# Altium PCB flatsat_2_PCB.PcbDoc (part 1 of 6)
Units mil, origin at the board's own origin, x right, y up, seen from the top; angles counter-clockwise.
Board outline 15748.03 x 9842.52 mil, 4 copper layers (Top Layer, FlatSat GND, FlatSat VCC, Bottom Layer), stack 82.765 mil thick; 155 components, 191 nets, 1391 pads, 1634 vias.
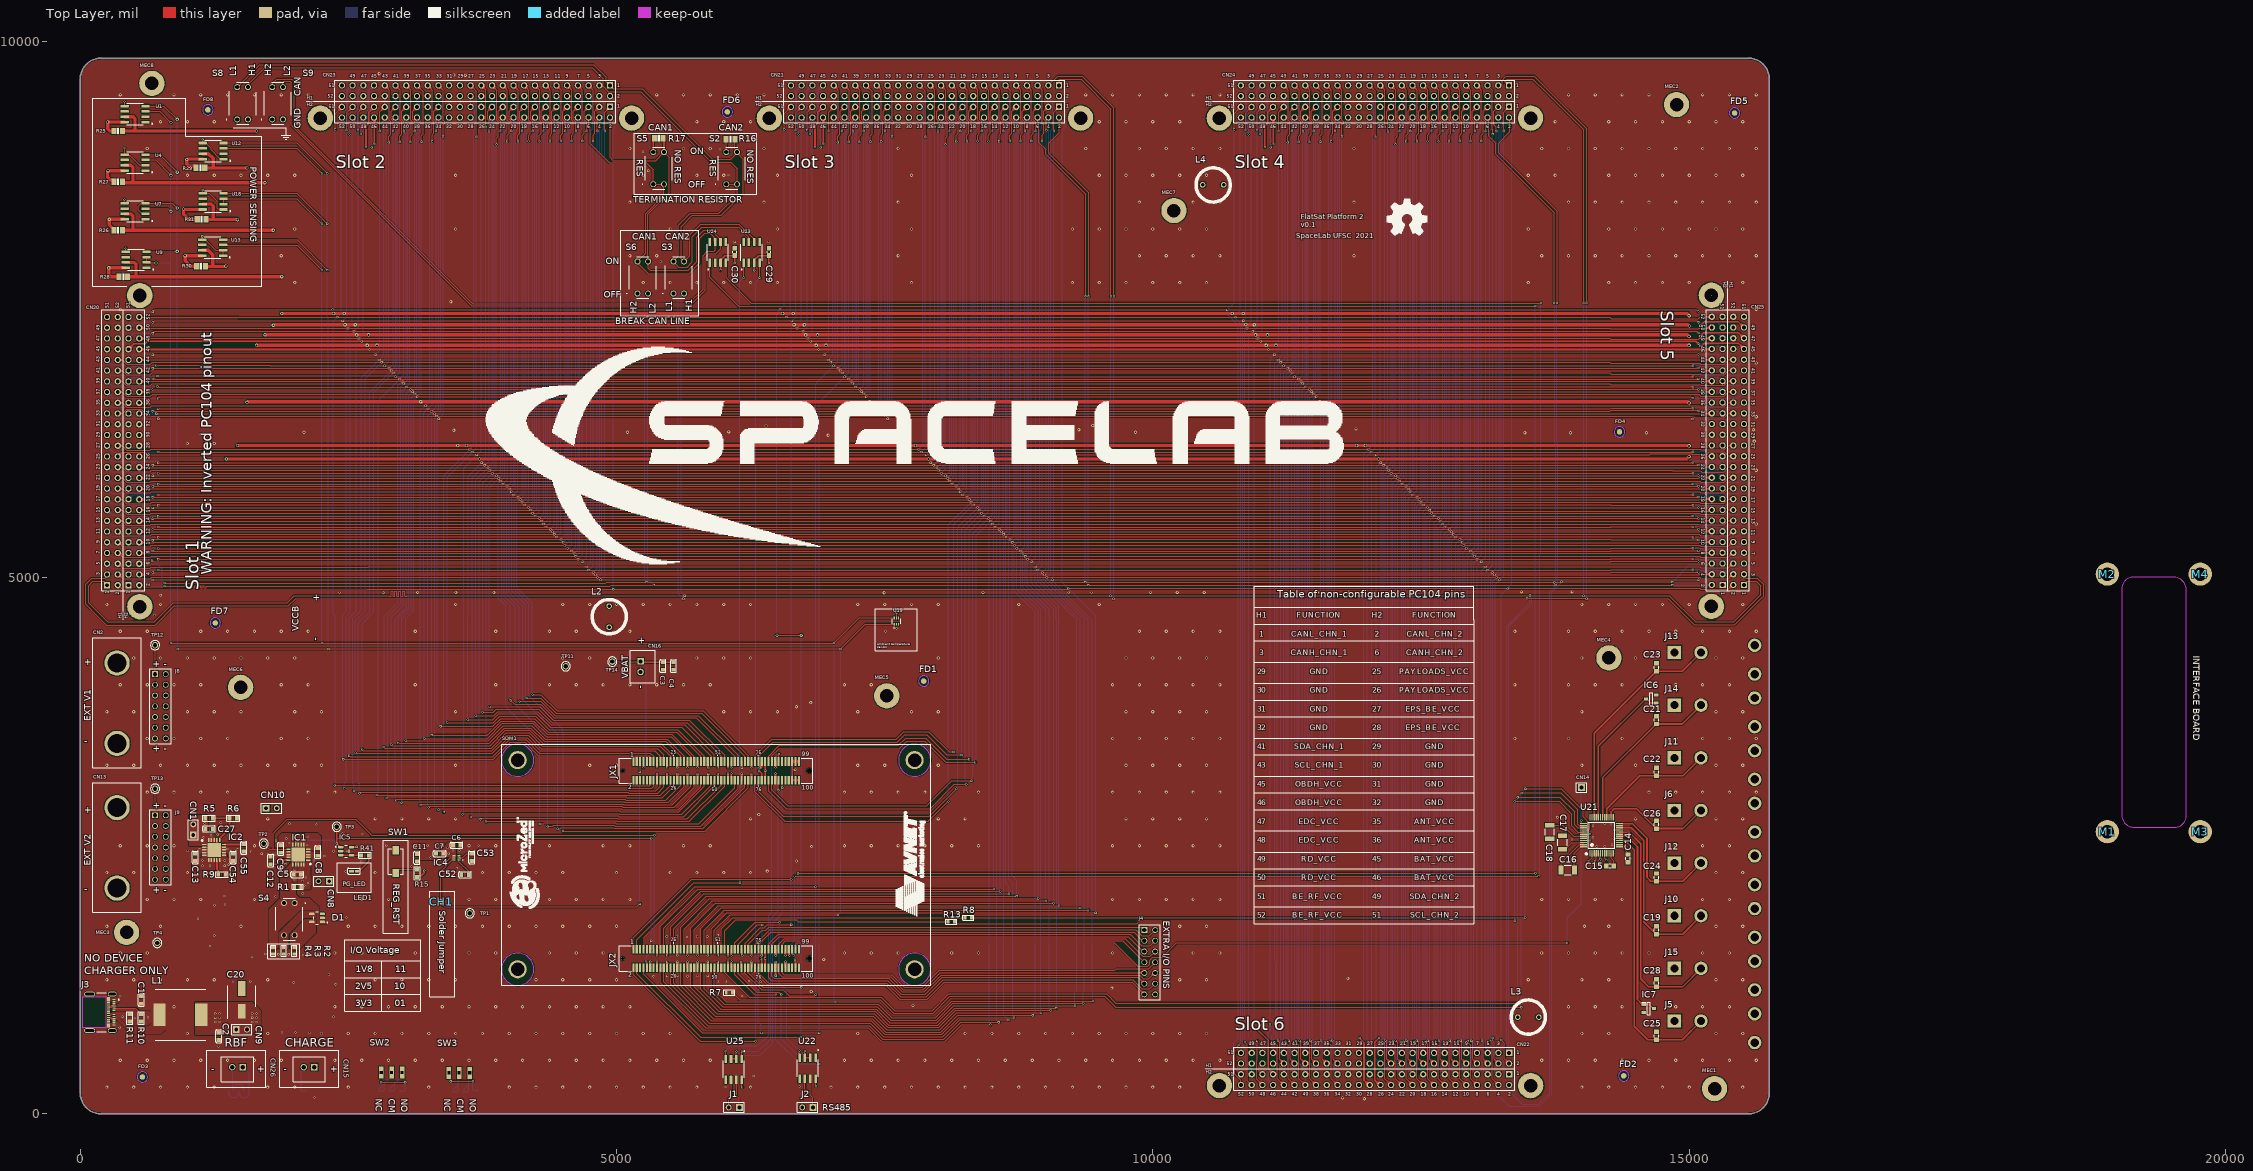
[diagram p0: Top Layer view]
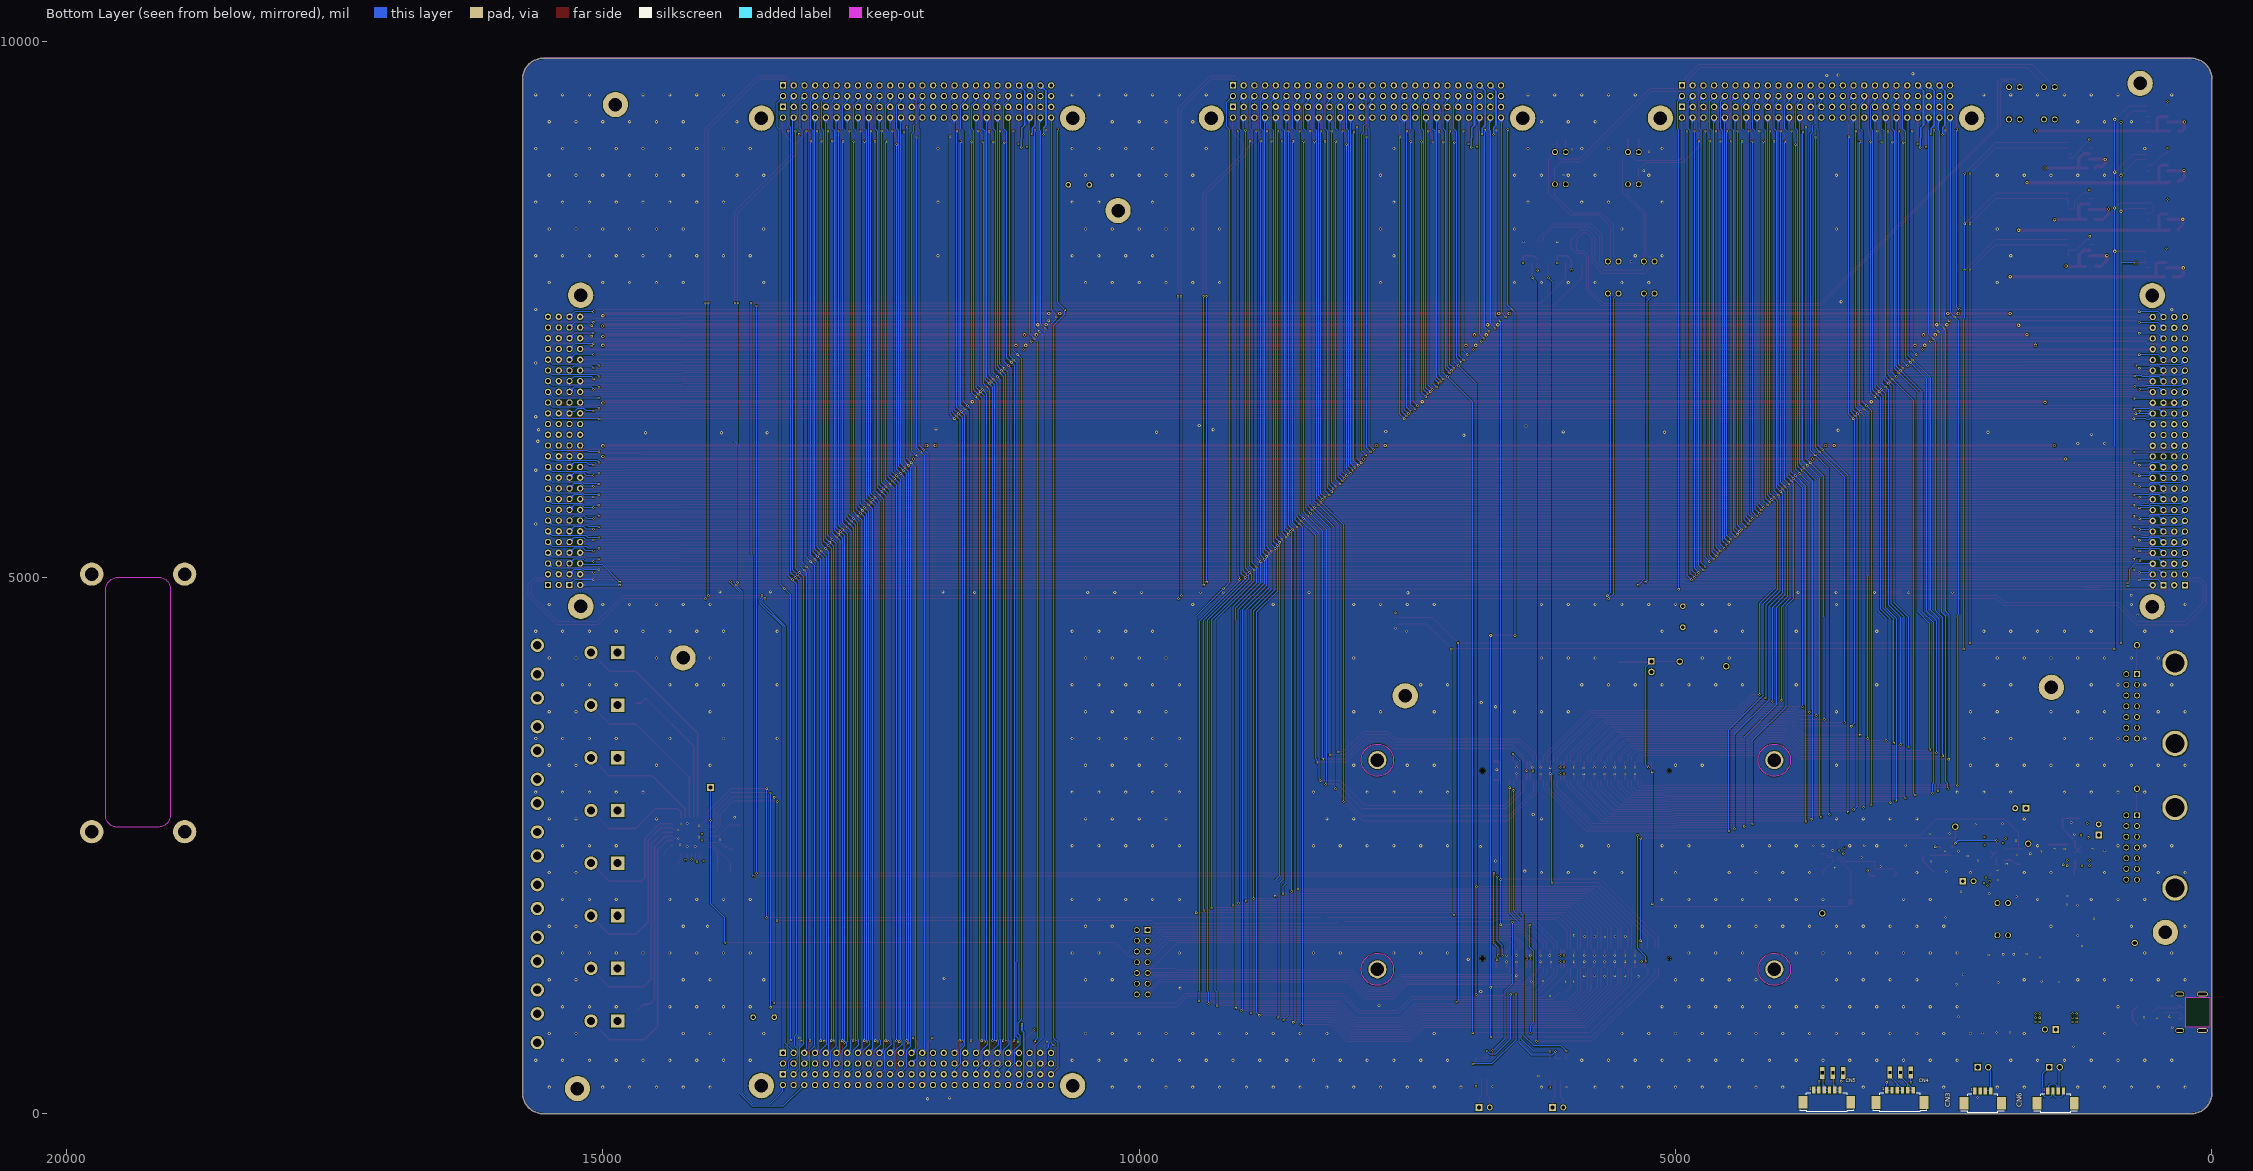
[diagram p1: Bottom Layer view, seen from below]
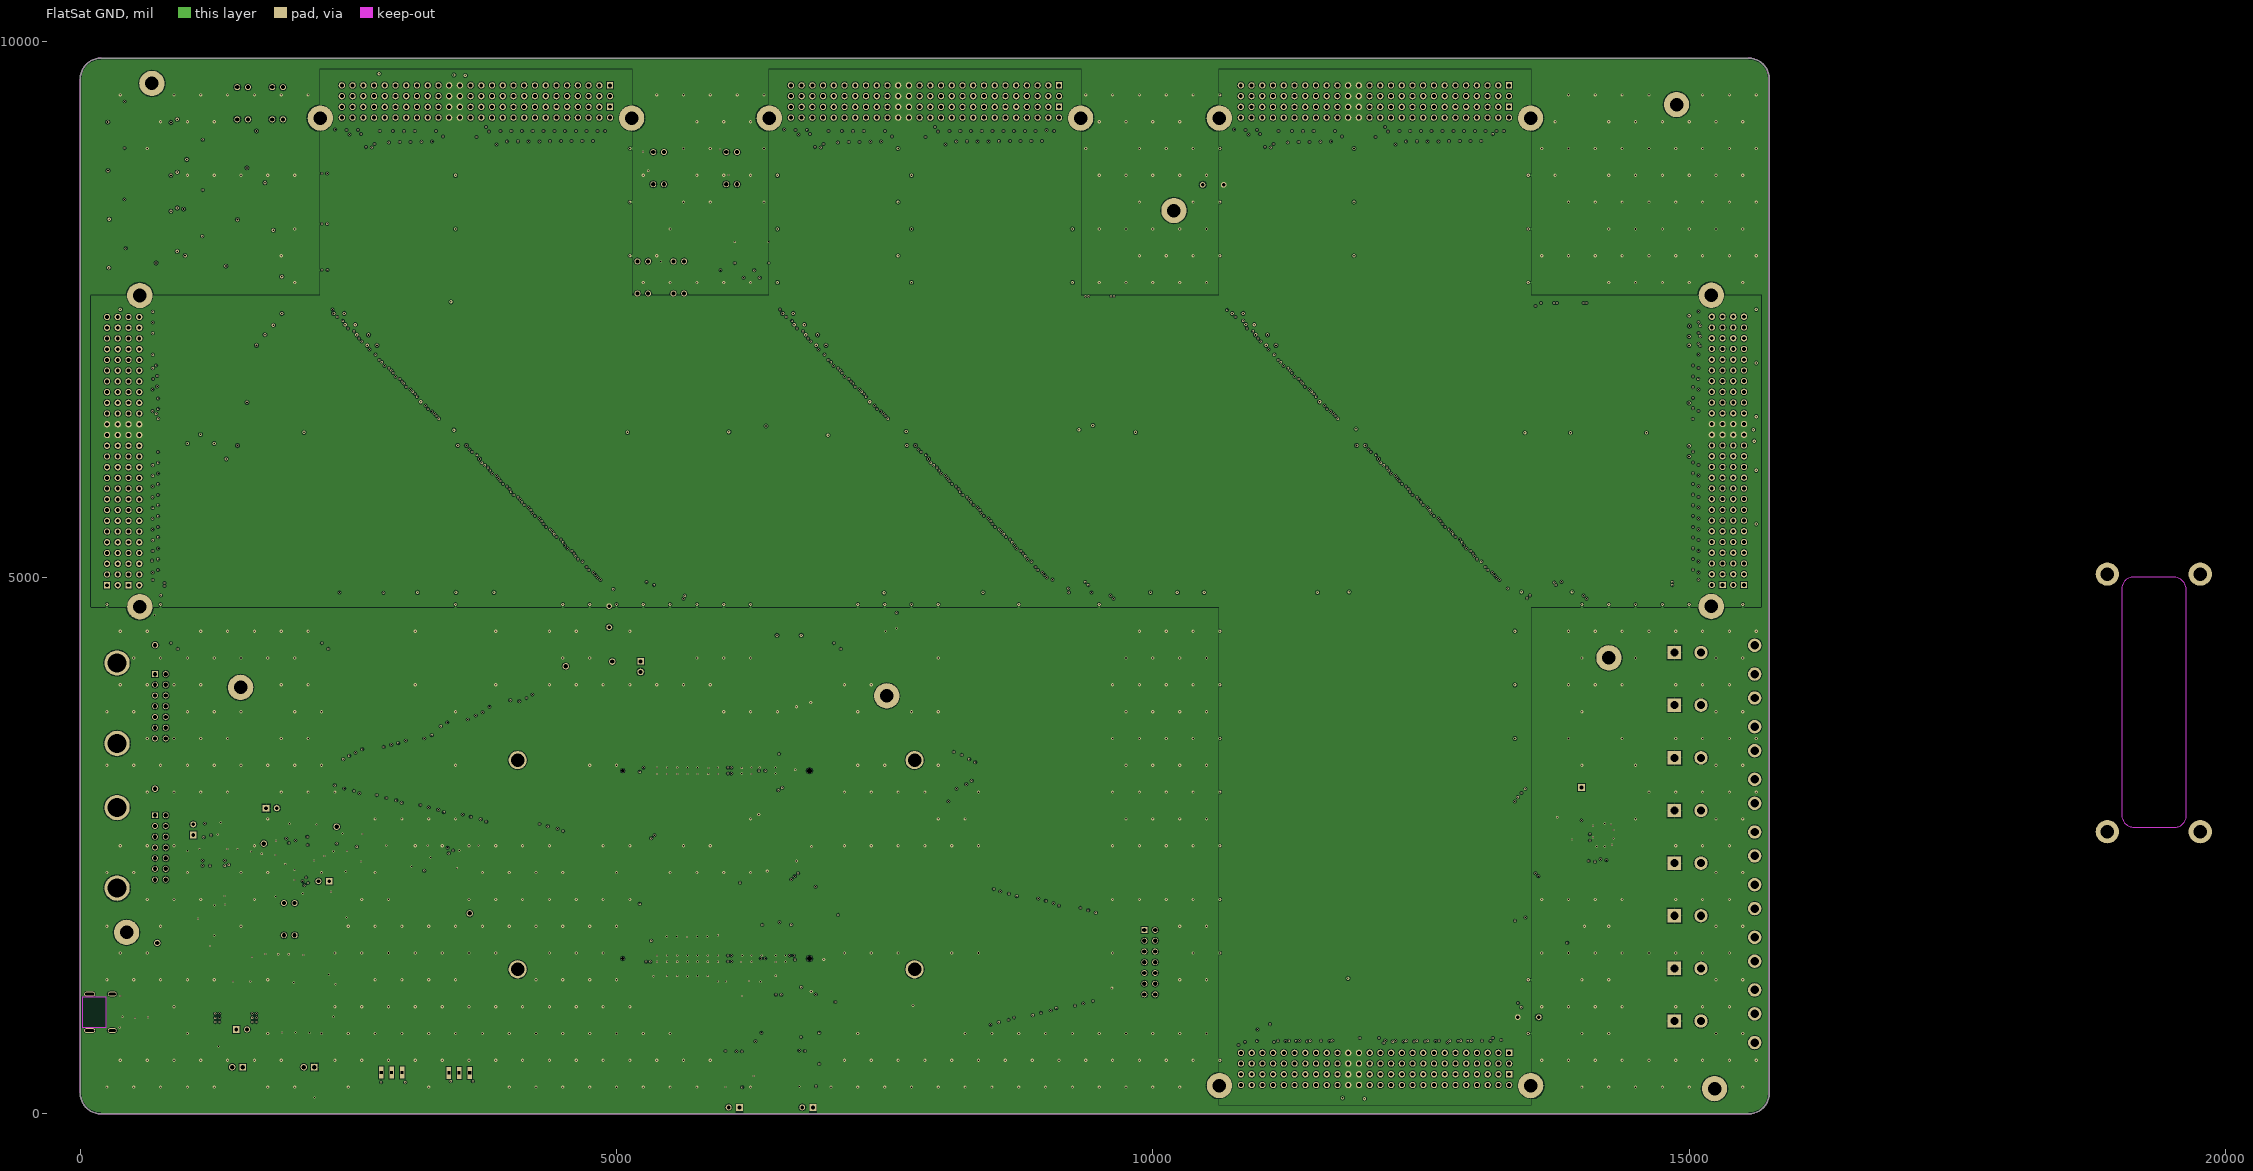
[diagram p2: FlatSat GND]
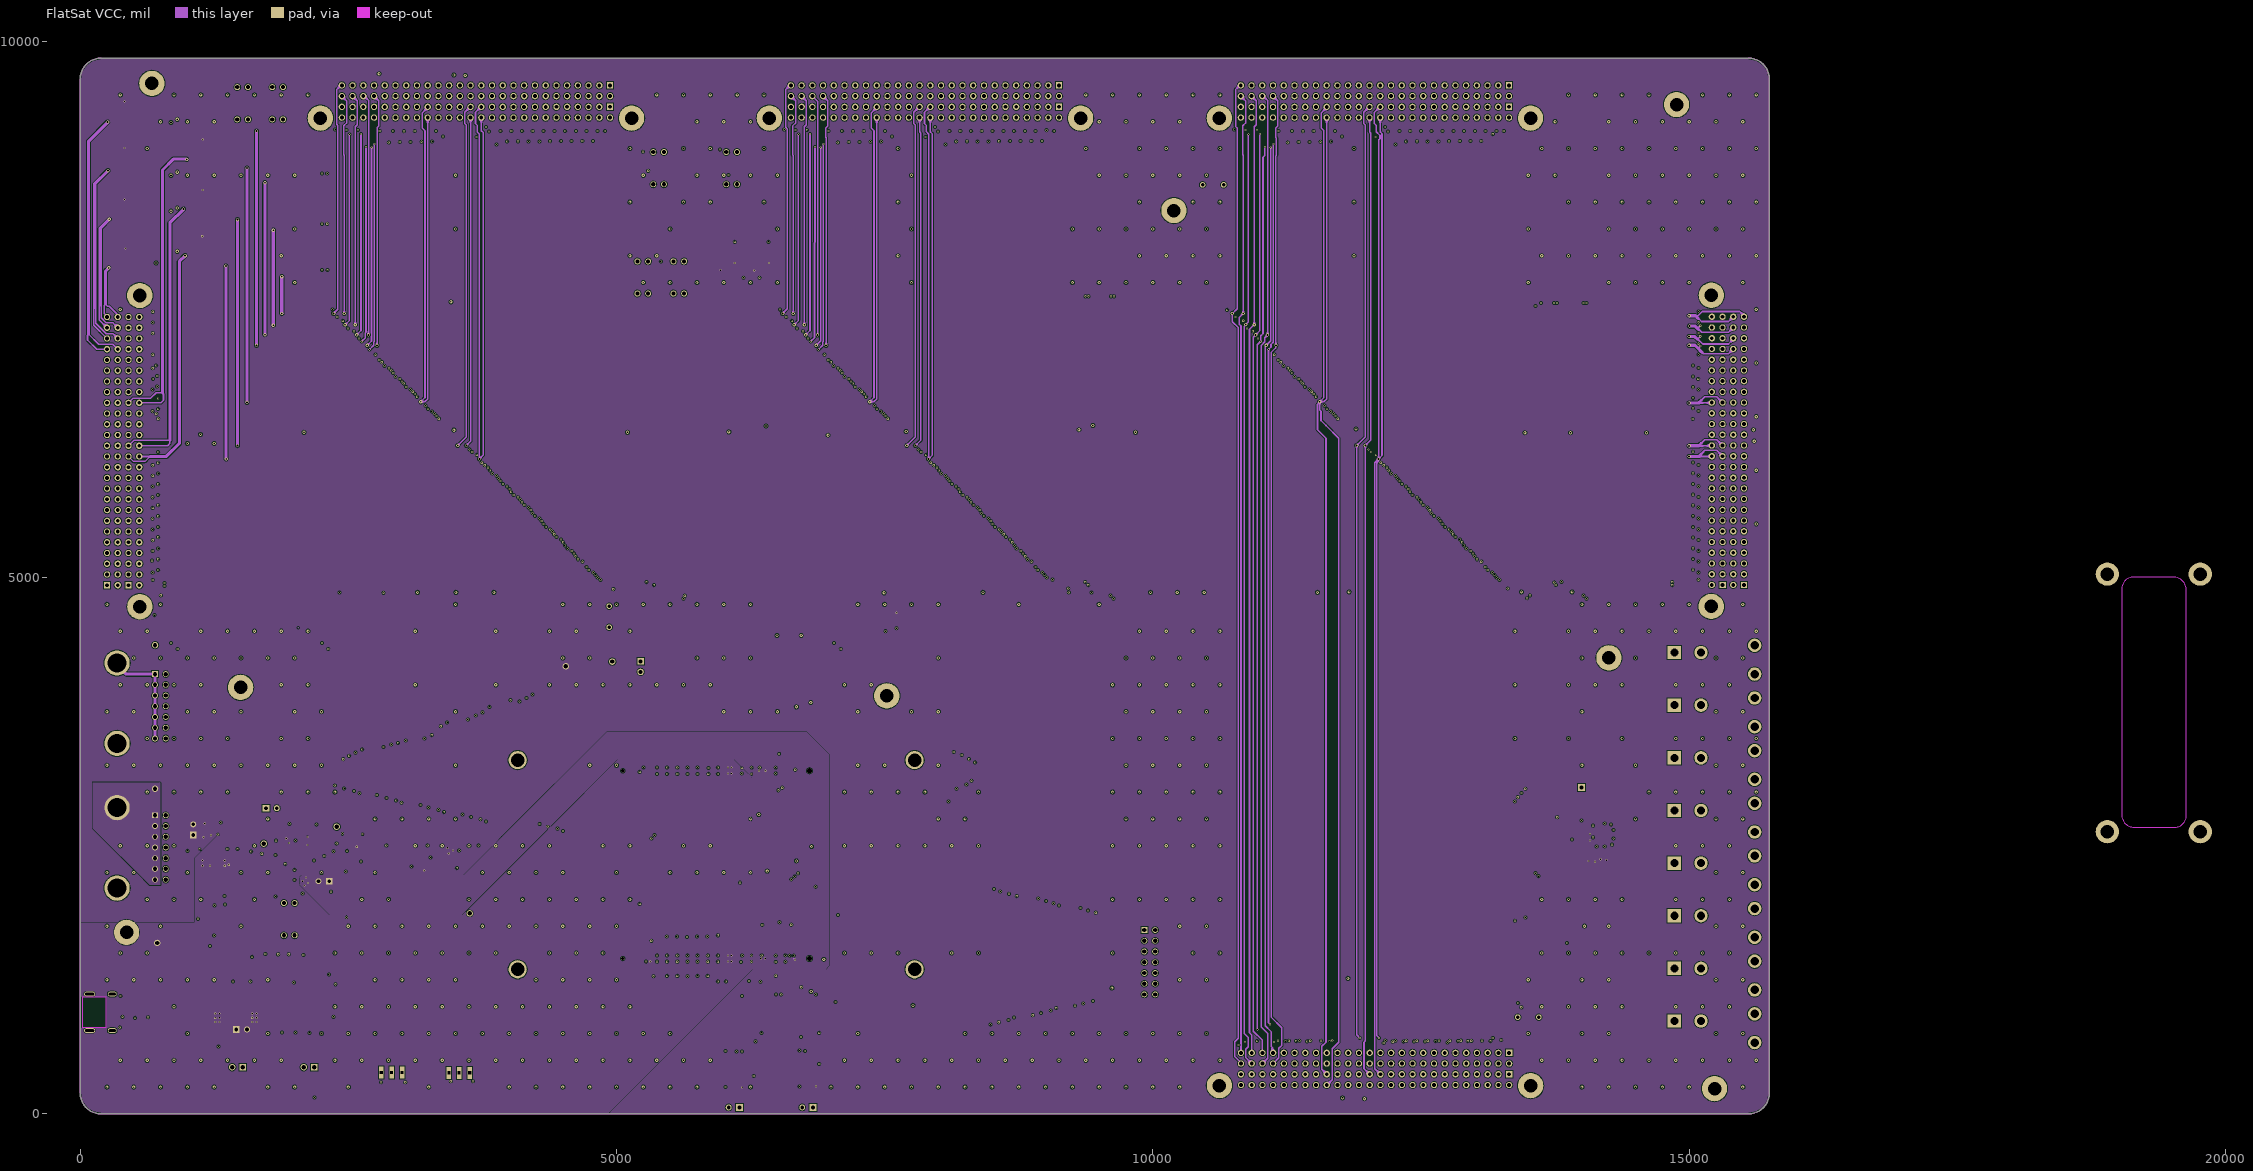
[diagram p3: FlatSat VCC]

## Layer stack, top to bottom
Top Solder: solder mask 0.5118, Solder Resist, Dk 3.3
Top Layer: signal copper 1.4
Dielectric 2: prepreg 7.0866, FR-4, Dk 4.29
FlatSat GND: signal copper 1.4
Dielectric 1: dielectric 62.9921, FR-4, Dk 4.29
FlatSat VCC: signal copper 1.4
Dielectric 3: prepreg 7.0866, FR-4, Dk 4.29
Bottom Layer: signal copper 1.4
Bottom Solder: solder mask 0.5118, Solder Resist, Dk 3.3

## Board outline
196.85,0 cw(c196.85,196.85) 0,196.85 0,9645.67 cw(c196.85,9645.67) 196.85,9842.52 15551.18,9842.52 cw(c15551.18,9645.67) 15748.03,9645.67 15748.03,196.85 cw(c15551.18,196.85) 15551.18,0
cut-out: 19031.5,4893.7 19031.5,2789.37 ccw(c19147.64,2789.37) 19147.64,2673.23 19527.56,2673.23 ccw(c19527.56,2779.53) 19633.86,2779.53 19633.86,4883.86 ccw(c19513.78,4883.86) 19513.78,5003.94 19141.73,5003.94 ccw(c19141.73,4893.7)

## Design rules (kind name [scope] priority, off if disabled: settings)
Clearance "Stitching GND" [IsStitchingVia and InNet('GND') vs (IsVia and (Not IsStitchingVia)) Or IsPad] p1: gap=10 ignorepadtopadclearanceinfootprint=FALSE except(16: THPad-Via THPad-Hole Via-Via Via-Hole)
Clearance [All] p2: gap=7.01 ignorepadtopadclearanceinfootprint=FALSE
DiffPairsRouting DiffPair_DIFF90DiffPairsRouting [InDifferentialPairClass('DIFF90')] p1: maxlimit=10 minlimit=8 mostfreqgap=9.17 toplayer_minwidth=8 toplayer_maxwidth=8 toplayer_prefwidth=8 midlayer1_minwidth=8 midlayer1_maxwidth=8 midlayer1_prefwidth=8 midlayer2_minwidth=8 midlayer2_maxwidth=8 midlayer2_prefwidth=8 bottomlayer_minwidth=8 bottomlayer_maxwidth=8 bottomlayer_prefwidth=8 maxuncoupledlength=500
DiffPairsRouting DiffPair_DIFF120DiffPairsRouting [InDifferentialPairClass('DIFF120')] p2: maxlimit=196.85 minlimit=15 mostfreqgap=20 toplayer_minwidth=8 toplayer_maxwidth=8 toplayer_prefwidth=8 midlayer1_minwidth=8 midlayer1_maxwidth=8 midlayer1_prefwidth=8 midlayer2_minwidth=8 midlayer2_maxwidth=8 midlayer2_prefwidth=8 bottomlayer_minwidth=8 bottomlayer_maxwidth=8 bottomlayer_prefwidth=8 maxuncoupledlength=393.7
DiffPairsRouting [All] p3: maxlimit=10 minlimit=10 mostfreqgap=10 toplayer_minwidth=15 toplayer_maxwidth=15 toplayer_prefwidth=15 midlayer1_minwidth=15 midlayer1_maxwidth=15 midlayer1_prefwidth=15 midlayer2_minwidth=15 midlayer2_maxwidth=15 midlayer2_prefwidth=15 bottomlayer_minwidth=15 bottomlayer_maxwidth=15 bottomlayer_prefwidth=15 maxuncoupledlength=500
HoleSize [All] p1: absolutevalues=TRUE maxlimit=200 minlimit=1 maxpercent=80.000 minpercent=20.000
MatchedLengths DiffPair_DIFF90MatchedLengths [InDifferentialPairClass('DIFF90')] p1: tolerance=157.48 checknetsindiffpair=TRUE checkdiffpairvsdiffpair=FALSE checkxsignals=FALSE checkothers=FALSE
MatchedLengths DiffPair_DIFF120MatchedLengths [InDifferentialPairClass('DIFF120')] p2: tolerance=157.48 checknetsindiffpair=TRUE checkdiffpairvsdiffpair=FALSE checkxsignals=FALSE checkothers=FALSE
MatchedLengths DiffPair_DIFF_120_2MatchedLengths [InDifferentialPairClass('DIFF_120_2')] p3: tolerance=1000 checknetsindiffpair=FALSE checkdiffpairvsdiffpair=TRUE checkxsignals=TRUE checkothers=TRUE
MatchedLengths DiffPair_DIFF_120_1MatchedLengths [InDifferentialPairClass('DIFF_120_1')] p4: tolerance=1000 checknetsindiffpair=FALSE checkdiffpairvsdiffpair=TRUE checkxsignals=TRUE checkothers=TRUE
MinimumSolderMaskSliver [All] p1: minsoldermaskwidth=0
PlaneClearance GND_PlaneClearance [InNet('GND')] p1: clearance=9.84
PlaneClearance PlaneClearance_1 [All] p2: clearance=7.87
PlaneConnect PWR [(InNet('+5V') OR InNet('VCCB') OR InNet('VBAT') OR InNet('USB_VBUS') OR InNet('VCCIO'))] p1: planeconnectstyle=Direct reliefexpansion=20 reliefentries=4 reliefconductorwidth=10 reliefairgap=10
PlaneConnect GND_PlaneConnect [InNet('GND')] p2: pad.planeconnectstyle=Relief pad.reliefexpansion=0 pad.reliefentries=4 pad.reliefconductorwidth=6.89 pad.reliefairgap=6.89 via.planeconnectstyle=Direct via.reliefexpansion=20 via.reliefentries=4 via.reliefconductorwidth=10 via.reliefairgap=10
PlaneConnect PlaneConnect_1 [All] p3: planeconnectstyle=Direct reliefexpansion=20 reliefentries=4 reliefconductorwidth=10 reliefairgap=10
PolygonConnect GND_PolygonConnect [InNet('GND')] p1: thpad.connectstyle=Relief thpad.reliefconductorwidth=10 thpad.reliefentries=4 thpad.polygonreliefangle="90 Angle" thpad.airgapwidth=10 smdpad.connectstyle=Relief smdpad.reliefconductorwidth=6.89 smdpad.reliefentries=4 smdpad.polygonreliefangle="90 Angle" smdpad.airgapwidth=6.89 smdpad.conductorbypadedge=TRUE smdpad.mindistance=15 smdpad.enablemindistance=FALSE via.connectstyle=Direct via.reliefconductorwidth=10 via.reliefentries=4 via.polygonreliefangle="90 Angle" via.airgapwidth=10
PolygonConnect PolygonConnect_1 [All] p2: connectstyle=Direct reliefconductorwidth=10 reliefentries=4 polygonreliefangle="90 Angle" airgapwidth=10
RoutingVias [All] p1: holewidth=28 width=50 viastyle="Through Hole" minholewidth=28 minwidth=50 maxholewidth=28 maxwidth=50
SilkToSilkClearance [All] p1: silktosilkclearance=5
SilkToSolderMaskClearance [IsPad] p1: minsilkscreentomaskgap=0 clearancetoexposedcopper=TRUE
SolderMaskExpansion SolderMaskExpansion_Via [IsVia] p1: expansion=4 istentingtop=FALSE
SolderMaskExpansion SolderMaskExpansion_1 [All] p2: expansion=4 istentingtop=FALSE
SupplyNets "Schematic Supply Nets" [InNet('GND')] p1: voltage=0.000
SupplyNets "Schematic Supply Nets_4" [InNet('VCCIO')] p2: voltage=0.000
SupplyNets "Schematic Supply Nets_10" [InNet('+5V')] p3: voltage=0.000
Width [All] p1: maxlimit=30 minlimit=7.95 preferedwidth=15 midlayer2_maxwidth=15 midlayer2_prefwidth=10.98 bottomlayer_maxwidth=15 bottomlayer_prefwidth=11 minimp=50.000000 maximp=50.000000 favimp=50.000000
23 further rules are at their usual default settings.

## Classes and differential pairs
component class power_schematic: C1 C2 C3 C4 C5 C6 C7 C8 C9 C11 C12 C13 C20 C27 C52 C53 C54 C55 CH1 CN1 CN2 CN3 CN8 CN9 CN10 CN13 CN15 CN16 D1 IC1 IC2 IC4 IC5 J3 J8 J9 L1 LED1 R1 R2 R3 R4 R5 R6 R9 R10 R11 R15 R41 S4 SW1
component class kill-switches_schematic: CN4 CN5 CN6 CN26 SW2 SW3
differential pair RS485_02: +RS485_02_P -RS485_02_N
differential pair RS485_01: +RS485_01_P -RS485_01_N
differential pair H2: +H2_P -H2_N
differential pair H1: +H1_P -H1_N
differential pair CAN_CHN_2: +CAN_CHN_2_P -CAN_CHN_2_N
differential pair CAN_CHN_1: +CAN_CHN_1_P -CAN_CHN_1_N

## Components (designator, comment, footprint, x,y, rotation, side; value= is the part's Value field where it differs from the comment)
C1 "GRM188R71C103KA01D" C0603_MD 570.87,1062.99 r90 top value=10n
C2 "CL10B104KA8NNNC" C0603_MD 1291.34,724.41 r270 top value=100n
C3 "GRM188R71H104JA93D" C0603_MD 5433.07,4175.2 r270 top value=0.1uF
C4 "EMK107BB7225MA-T" C0603_MD 5531.5,4175.2 r270 top value=2.2uF
C5 "Cout" C0603_MD 2024.61,2231.3 r180 top value=10uF
C6 "EMK107F105ZA-T" C0603_MD 3509.84,2505.47 r0 top value=1uF
C7 "CL10B104KA8NNNC" C0603_MD 3352.36,2426.73 r180 top value=0.1uF
C8 "Cin" C0603_MD 2214.57,2440.94 r270 top value=1uF
C9 "Cbias" C0603_MD 1870.08,2470.47 r270 top value=1uF
C11 "CL10B104KA8NNNC" C0603_MD 3139.76,2387.36 r270 top value=0.1uF
C12 "CL10B103KB8NNNC" C0603_MD 1775.59,2362.2 r90 top value=10nF
C13 "Cin" C0603_MD 1072.83,2391.73 r90 top value=1uF
C14 "1.0uF/50V" CC0805 14429.13,2381.89 r270 top
C15 "1.0uF/50V" CC0805 14261.81,2312.99 r180 top
C16 "10uF/16V" CC1210 13868.11,2273.62 r180 top
C17 "10uF/16V" CC1210 13818.9,2529.53 r90 top
C18 "10uF/16V" CC1210 13700.79,2627.95 r270 top
C19 "0.1uF/25V" CC0805 14694.88,1712.6 r270 top
C20 "865080845004" CAPAE660X770N 1505.91,1062.99 r90 top value=4.7uF
C21 "0.1uF/25V" CC0805 14694.88,3671.26 r270 top
C22 "0.1uF/25V" CC0805 14694.88,3188.98 r270 top
C23 "0.1uF/25V" CC0805 14694.88,4163.39 r270 top
C24 "0.1uF/25V" CC0805 14694.88,2204.72 r270 top
C25 "0.1uF/25V" CC0805 14694.88,728.35 r270 top
C26 "0.1uF/25V" CC0805 14694.88,2696.85 r270 top
C27 "Cout" C0603_MD 1200.79,2657.48 r0 top value=10uF
C28 "0.1uF/25V" CC0805 14694.88,1220.47 r270 top
C29 "100nF/50V" CC0603 6421.26,8035.43 r90 top
C30 "100nF/50V" CC0603 6102.36,8035.43 r90 top
C52 "CL10B473KB8NNNC" C0603_MD 3588.58,2229.88 r180 top value=0.047uF
C53 "CL10B223KB8NNNC" C0603_MD 3651.57,2391.73 r270 top value=0.022uF
C54 "Cbias" C0603_MD 1427.17,2391.73 r90 top value=1uF
C55 "CL10B103KB8NNNC" C0603_MD 1525.59,2480.32 r90 top value=10nF
CH1 "Solder Jumper" "Solder Jumper" 3366.14,1978.35 r270 top
CN1 "5-146285-2" "PIN BAR 2 2.54mm 180 GRAUS" 1055.12,2649.61 r90 top
CN2 "4243-0" 4243-0 344.49,3828.74 r90 top
CN3 "4 pin Picoblade" "PICO BLADE 0532610471" 2135.83,157.48 r180 bottom value=0533980471
CN4 "6 pin Picoblade" "PICO BLADE 0532610671" 2908.46,164.37 r180 bottom
CN5 "6 pin Picoblade" "PICO BLADE 0532610671" 3589.57,165.35 r180 bottom
CN6 "4 pin Picoblade" "PICO BLADE 0532610471" 1456.69,157.48 r180 bottom value=0533980471
CN8 "5-146285-2" "PIN BAR 2 2.54mm 180 GRAUS" 2271.65,2169.29 r180 top
CN9 "5-146285-2" "PIN BAR 2 2.54mm 180 GRAUS" 1505.91,787.4 r0 top
CN10 "5-146285-2" "PIN BAR 2 2.54mm 180 GRAUS" 1783.46,2850.39 r0 top
CN13 "4243-0" 4243-0 344.49,2480.31 r90 top
CN14 "TSW-101-05-T-S" "PIN BAR 1 2.54mm 180 GRAUS - Hide" 13996.06,3043.31 r270 top
CN15 "JST 2 position header 2.5mm" B2B-XH-A-M(LF)(SN) 2134.35,436.22 r180 top value=5-146285-2
CN16 "JST 2 position header 2.5mm" B2B-XH-A-M(LF)(SN) 5224.53,4169.57 r270 top
CN20 "PC104_inverted" PC104_INVERTED 556.18,4935.12 r90 top
CN21 "PC104" PC104 6610,9748.19 r0 top
CN22 "PC104" PC104 10805.6,729.42 r0 top
CN23 "PC104" PC104 2424.17,9748.19 r0 top
CN24 "PC104" PC104 10804.49,9748.19 r0 top
CN25 "PC104" PC104 15671.23,7447.28 r270 top
CN26 "JST 2 position header 2.5mm" B2B-XH-A-M(LF)(SN) 1466.54,436.22 r180 top
D1 "ESDS314DBVR" SOT95P280X145-5N 2208.66,1826.77 r180 top
FD1 "Fiducial 1.3" "Fiducial 1.3mm" 7864.17,4035.43 r0 top
FD2 "Fiducial 1.3" "Fiducial 1.3mm" 14389.76,354.33 r0 top
FD3 "Fiducial 1.3" "FIDUCIAL 1.3MM" 580.71,344.49 r0 top
FD4 "Fiducial 1.3" "FIDUCIAL 1.3MM" 14350.39,6358.27 r0 top
FD5 "Fiducial 1.3" "Fiducial 1.3mm" 15423.23,9330.71 r0 top
FD6 "Fiducial 1.3" "Fiducial 1.3mm" 6033.46,9340.55 r0 top
FD7 "Fiducial 1.3" "Fiducial 1.3mm" 1259.84,4576.77 r0 top
FD8 "Fiducial 1.3" "FIDUCIAL 1.3MM" 1190.94,9360.24 r0 top
IC1 "TPS74401RGWRM3" QFN65P500X500X100-21N-D 2034.45,2418.31 r180 top
IC2 "TPS74401RGWRM3" QFN65P500X500X100-21N-D 1250,2460.63 r0 top
IC4 "TPS3899DL30DSER" TPS3899DL30DSER 3509.84,2387.36 r180 top
IC5 "LM321LVIDBVR" SOT95P280X145-5N 2479.13,2449.8 r0 top
IC6 "MMBT3904" SOT95P240X120-3N 14645.67,3868.11 r180 top
IC7 "MMBT3904" SOT95P240X120-3N 14624.02,982.28 r0 top
J1 "5-146280-2" "PIN BAR 2 2.54mm 180 GRAUS" 6095.82,61.02 r180 top
J2 "5-146280-2" "PIN BAR 2 2.54MM 180 GRAUS" 6781.5,61.02 r180 top
J3 "1054500101" FP-1054500101-MFG 167.32,947.64 r270 top
J4 "87832-1420" SAMTEC_TSW-107-05-F-D 9921.26,1714.17 r270 top
J5 "Soquete de termopar" PCC-SMP-V-K 14862.2,866.18 r0 top
J6 "Soquete de termopar" PCC-SMP-V-K 14862.2,2829.06 r0 top
J8 "87832-1420" SAMTEC_TSW-107-05-F-D 698.2,4100.21 r270 top
J9 "87832-1420" SAMTEC_TSW-107-05-F-D 698.2,2784.25 r270 top
J10 "Soquete de termopar" PCC-SMP-V-K 14862.2,1847.62 r0 top
J11 "Soquete de termopar" PCC-SMP-V-K 14862.2,3319.77 r0 top
J12 "Soquete de termopar" PCC-SMP-V-K 14862.2,2338.34 r0 top
J13 "Soquete de termopar" PCC-SMP-V-K 14862.2,4301.21 r0 top
J14 "Soquete de termopar" PCC-SMP-V-K 14862.2,3810.49 r0 top
J15 "Soquete de termopar" PCC-SMP-V-K 14862.2,1356.9 r0 top
L1 "742792901" WE-PF_7427929...60 935.04,925.2 r0 top
L2 "RL622-3R3K-RC" RL622 4931.1,4635.83 r90 top
L3 "RL622-3R3K-RC" RL622 13500,901.57 r180 top
L4 "RL622-3R3K-RC" RL622 10562.52,8661.91 r0 top
LED1 "150160GS73103" "0603 (1608 metric)" 2559.06,2263.78 r0 top
M1 "IB Mechanical Hole" "M3 hole (5.5mm pad)"#1 18898.26,2631.05 r90 top
M2 "IB Mechanical Hole" "M3 hole (5.5mm pad)"#1 18898.26,5032.62 r90 top
M3 "IB Mechanical Hole" "M3 hole (5.5mm pad)"#2 19803.78,2631.05 r90 top
M4 "IB Mechanical Hole" "M3 hole (5.5mm pad)"#2 19803.78,5032.62 r90 top
MEC1 "M3" "M3 HOLE" 15236.22,236.22 r0 top
MEC2 "M3" "M3 HOLE" 14881.89,9409.45 r0 top
MEC3 "M3" "M3 HOLE" 433.07,1692.91 r0 top
MEC4 "M3" "M3 HOLE" 14251.97,4251.97 r0 top
MEC5 "M3" "M3 HOLE" 7519.69,3897.64 r0 top
MEC6 "M3" "M3 HOLE" 1496.06,3976.38 r0 top
MEC7 "M3" "M3 HOLE" 10196.85,8421.49 r0 top
MEC8 "M3" "M3 HOLE" 669.29,9606.3 r0 top
R1 "RMCF0603FT47K0" R0603_HD 2027.56,2116.14 r180 top value=47k
R2 "ERJ-PB3B2492V" R0603_HD 1996.06,1519.68 r270 top value=24K9
R3 "ERJH3ED3652V" R0603_HD 1897.64,1519.68 r270 top value=53K6
R4 "ERJ-H3ED3652V" R0603_HD 1799.21,1519.68 r270 top value=37K5
R5 "RMCF0603FT3K57" R0603_MD 1200.79,2755.91 r0 top value=3.57k
R6 "CPF0603F1K15C1" R0603_MD 1427.17,2755.91 r0 top value=1K15
R7 "CRCW060350R0FKEA" R0603_HD 6053.15,1131.89 r180 top value=50R
R8 "CRCW060350R0FKEA" R0603_HD 8277.56,1830.71 r0 top value=50R
R9 "RMCF0603FT3K57" R0603_MD 1322.83,2232.28 r180 top value=3.57k
R10 "RMCF0603FT5K10" R0603_MD 570.87,895.67 r270 top value=5.1k
R11 "RMCF0603FT5K10" R0603_MD 462.6,895.67 r270 top value=5.1k
R13 "CRCW060350R0FKEA" R0603_HD 8120.08,1791.34 r0 top value=50R
R15 "RMCF0603FT47K0" R0603_MD 3141.73,2244.09 r90 top value=47k
R16 "120R" 0805 6062.99,9084.65 r180 top
R17 "120R" 0805 5393.7,9094.49 r180 top
R25 "DNP" 0805 354.33,9163.39 r0 top
R26 "DNP" 0805 354.33,8238.19 r0 top
R27 "DNP" 0805 354.33,8690.94 r0 top
R28 "DNP" 0805 403.54,7805.12 r0 top
R29 "DNP" 0805 1122.05,8818.9 r0 top
R30 "DNP" 0805 1127.46,7902.04 r0 top
R31 "DNP" 0805 1131.89,8338.98 r0 top
R41 "RC0603FR-07240RL" R0603_MD 2654.72,2410.43 r0 top value=240R
S2 "NDS02V" NDS02V 6073.62,8666.54 r0 top
S3 "NDS02V" NDS02V 5580.71,7647.64 r0 top
S4 "NDS02V" NDS02V 1950,1965.35 r180 top
S5 "NDS02V" NDS02V 5392.91,8666.54 r0 top
S6 "NDS02V" NDS02V 5245.28,7647.64 r0 top
S8 "NDS02V" NDS02V 1514.96,9271.65 r0 top
S9 "NDS02V" NDS02V 1841.34,9271.65 r0 top
SOM1 "MicroZed" MICROZEDSOM 7929.13,1198.32 r90 top
SW1 "434123050836" 4341x30508x6 2942.91,2352.36 r90 top
SW2 "SW-T3-2B-A-A3-S1" SW-T3-2B-A-A3-S1 2744.67,488.06 r270 top
SW3 "SW-T3-2B-A-A3-S1" SW-T3-2B-A-A3-S1 3374.59,486.2 r270 top
TP1 "" "TEST POINT PTH" 3631.89,1870.08 r0 top
TP2 "" "TEST POINT PTH" 1712.6,2519.68 r0 top
TP3 "" "TEST POINT PTH" 2391.73,2677.17 r0 top
TP4 "" "TEST POINT PTH" 718.5,1594.49 r0 top
TP11 "" "TEST POINT PTH" 4527.56,4173.23 r90 top
TP12 "" "TEST POINT PTH" 698.82,4370.08 r180 top
TP13 "" "TEST POINT PTH" 698.82,3031.5 r270 top
TP14 "" "TEST POINT PTH" 4960.63,4216.54 r90 top
U1 "INA219AID" SOIC127P599X175-8N 511.81,9320.87 r180 top
U4 "INA219AID" SOIC127P599X175-8N 511.81,8868.11 r180 top
U7 "INA219AID" SOIC127P599X175-8N 511.81,8415.35 r180 top
U9 "INA219AID" SOIC127P599X175-8N 521.65,7962.6 r180 top
U12 "INA219AID" SOIC127P599X175-8N 1240.16,8976.38 r180 top
U13 "INA219AID" SOIC127P599X175-8N 1235.73,8076.18 r180 top
U18 "INA219AID" SOIC127P599X175-8N 1240.16,8506.3 r180 top
U19 "TMP112AIDRLT" SOT50P160X60-6N 7610.24,4594.49 r90 top
U21 "LTC2983CLX#PBF" QFP50P900X900X160-48N 14183.07,2598.43 r90 top
U22 "ISL83483IBZ" SOIC127P600X175-8N 6781.5,425.2 r270 top
U23 "SN65HVD232D" SOIC127P599X175-8N 6259.84,8031.5 r90 top
U24 "SN65HVD232D" SOIC127P599X175-8N 5944.88,8031.5 r90 top
U25 "ISL83483IBZ" SOIC127P600X175-8N 6092.52,415.35 r270 top

## Footprints (in the part's own frame and the unit in brackets; to place one, negate y for a bottom-side part, rotate by r counter-clockwise, add the part's x,y. Pads: shape width x height; smd on the part's side, far side on the other; paste and mask are expansions set on the pad)
"0603 (1608 metric)" [mm]
  rect 1.2x0.6 smd mask+0.076: 1(-0.762,0)
  rect 1x0.6 smd mask+0.076: 2(0.538,0)
  silkscreen extent -1.63,-0.7 1.37,0.7, body extent -1.13,-0.39 0.87,0.39, height 0.79
0805 [mil]
  rect 47.24x60 smd: 1(-40,0) 2(40,0)
  silkscreen extent -10,-30 10,30, body extent -50,-24 49,25, height 31
4243-0 [mm]
  round 6 hole 4.5: 0(-9.525,0) 1(9.525,0)
  silkscreen extent -15.28,-5.75 15.48,5.75, body extent -15.12,-5.6 15.28,5.6, height 24.13
4341x30508x6 [mm]
  rect 2x1.5 smd: 1(-2.7,0) 2(2.7,0)
  silkscreen extent -3,-1.75 3,1.75, body extent -3.6,-1.75 3.6,1.75, height 5
B2B-XH-A-M(LF)(SN) [mil]
  rect 60x60 hole 39.37: 1(-49.21,0)
  round 60 hole 39.37: 2(49.21,0)
  silkscreen extent -153,-98 150,138, body extent -148,-94 144,133, height 276
C0603_MD [mm] "Chip Capacitor, Body 1.6x0.8mm, IPC Medium Density"
  rect 0.9x1 smd: 1(-0.889,0) 2(0.889,0)
  silkscreen extent -1.5,-0.7 1.5,0.7, body extent -1,-0.41 1,0.38, height 0.79
CAPAE660X770N [mm]
  rect 3.5x1.85 smd: 1(-2.7,0) 2(2.7,0)
  silkscreen extent -4.45,-3.3 3.3,3.3, body extent -3.75,-3.4 3.75,3.4, height 7.7
CC0603 [mm]
  rect 1.1x1 smd: 1(-0.85,0) 2(0.85,0)
  silkscreen extent -0.15,-0.45 0.15,0.45, body extent -1,-0.41 1,0.38, height 0.79
CC0805 [mm] "TDK mlccspec_commercial_general_midvoltage_en.pdf"
  rect 1.05x1.2 smd: 1(-0.925,0) 2(0.925,0)
  silkscreen extent -0.3,-0.5 0.3,0.5, body extent -1.25,-0.62 1.25,0.62, height 0.78
CC1210 [mm] "TDK mlccspec_commercial_general_midvoltage_en.pdf"
  rect 1.1x2.2 smd: 1(-1.6,0) 2(1.6,0)
  silkscreen extent -0.8,-1.1 0.8,1.1, body extent -2,-1.24 2,1.24, height 1.69
"Fiducial 1.3mm" [mm]
  round 1.3 smd mask+0.6: FD0(0,0)
  Top Layer keep-out circle w0.1: c0,0 r1.25
"FIDUCIAL 1.3MM" [mm]
  round 1.3 smd mask+0.6: FD0(0,0)
  Top Layer keep-out circle w0.1: c0,0 r1.25
FP-1054500101-MFG [mm]
  rrect100% 1.1x2.1 hole 1.6 slot 0.6 at 0 deg paste-2539.97 mask+0: 1(-4.32,3.36) 2(4.32,3.36)
  rrect100% 1.1x2.6 hole 2.1 slot 0.6 at 0 deg paste-2539.97 mask+0: 3(-4.32,-2) 4(4.32,-2)
  rect 0.3x0.7 smd paste+0 mask+0: A1(-3,3.77) A2(-2.5,3.77) A3(-2,3.77) A4(-1.5,3.77) A5(-1,3.77) A6(-0.5,3.77) A7(0.5,3.77) A8(1,3.77) A9(1.5,3.77) A10(2,3.77) A11(2.5,3.77) A12(3,3.77) B2(2.25,2.47) B3(1.75,2.47) B4(1.25,2.47) B5(0.75,2.47) B6(0.25,2.47) B7(-0.25,2.47) B8(-0.75,2.47) B9(-1.25,2.47) B10(-1.75,2.47) B11(-2.25,2.47)
  rect 1x0.7 smd paste+0 mask+0: B1(3.1,2.47) B12(-3.1,2.47)
  Keep-Out Layer region: -3.501,-3.77 3.499,-3.77 3.499,1.88 -3.501,1.88
  silkscreen extent -4.57,-0.3 4.57,5.04
"M3 HOLE" [mm]
  round 6 hole 3.2: 0(0,0)
"M3 hole (5.5mm pad)"#1 [mm]
  round 5.5 hole 3.2: 0(0,0)
"M3 hole (5.5mm pad)"#2 [mm]
  round 5.5 hole 3.2: 0(0,1)
MICROZEDSOM [mil] "MicroZed SOM Footprint"
  round 170 hole 125: 0(150,3850) 0(150,150) 0(2100,3850) 0(2100,150)
  round 30 hole 32.01 unplated: 0(250.5,2870) 0(2000.5,2870)
  round 45.98 hole 47.99 unplated: 0(250.5,1130) 0(2000.5,1130)
  rect 80x20 smd: JX1-1(2087.11,2771.65) JX1-2(1913.89,2771.65) JX1-3(2087.11,2740.16) JX1-4(1913.89,2740.16) JX1-5(2087.11,2708.66) JX1-6(1913.89,2708.66) JX1-7(2087.11,2677.17) JX1-8(1913.89,2677.17) JX1-9(2087.11,2645.67) JX1-10(1913.89,2645.67) JX1-11(2087.11,2614.17) JX1-12(1913.89,2614.17) JX1-13(2087.11,2582.68) JX1-14(1913.89,2582.68) JX1-15(2087.11,2551.18) JX1-16(1913.89,2551.18) JX1-17(2087.11,2519.68) JX1-18(1913.89,2519.69) JX1-19(2087.11,2488.19) JX1-20(1913.89,2488.19) JX1-21(2087.11,2456.69) JX1-22(1913.89,2456.69) JX1-23(2087.11,2425.2) JX1-24(1913.89,2425.2) JX1-25(2087.11,2393.7) JX1-26(1913.89,2393.7) JX1-27(2087.11,2362.2) JX1-28(1913.89,2362.21) JX1-29(2087.11,2330.71) JX1-30(1913.89,2330.71) JX1-31(2087.11,2299.21) JX1-32(1913.89,2299.21) JX1-33(2087.11,2267.72) JX1-34(1913.89,2267.72) JX1-35(2087.11,2236.22) JX1-36(1913.89,2236.22) JX1-37(2087.11,2204.72) JX1-38(1913.89,2204.73) JX1-39(2087.11,2173.23) JX1-40(1913.89,2173.23) JX1-41(2087.11,2141.73) JX1-42(1913.89,2141.73) JX1-43(2087.11,2110.24) JX1-44(1913.89,2110.24) JX1-45(2087.11,2078.74) JX1-46(1913.89,2078.74) JX1-47(2087.11,2047.24) JX1-48(1913.89,2047.25) JX1-49(2087.11,2015.75) JX1-50(1913.89,2015.75) JX1-51(2087.11,1984.25) JX1-52(1913.89,1984.25) JX1-53(2087.11,1952.76) JX1-54(1913.89,1952.76) JX1-55(2087.11,1921.26) JX1-56(1913.89,1921.26) JX1-57(2087.11,1889.76) JX1-58(1913.89,1889.77) JX1-59(2087.11,1858.27) JX1-60(1913.89,1858.27) JX1-61(2087.11,1826.77) JX1-62(1913.89,1826.77) JX1-63(2087.11,1795.28) JX1-64(1913.89,1795.28) JX1-65(2087.11,1763.78) JX1-66(1913.89,1763.78) JX1-67(2087.11,1732.28) JX1-68(1913.89,1732.29) JX1-69(2087.11,1700.79) JX1-70(1913.89,1700.79) JX1-71(2087.11,1669.29) JX1-72(1913.89,1669.29) JX1-73(2087.11,1637.8) JX1-74(1913.89,1637.8) JX1-75(2087.11,1606.3) JX1-76(1913.89,1606.3) JX1-77(2087.11,1574.8) JX1-78(1913.89,1574.81) JX1-79(2087.11,1543.31) JX1-80(1913.89,1543.31) JX1-81(2087.11,1511.81) JX1-82(1913.89,1511.81) JX1-83(2087.11,1480.31) JX1-84(1913.89,1480.32) JX1-85(2087.11,1448.82) JX1-86(1913.89,1448.82) JX1-87(2087.11,1417.32) JX1-88(1913.89,1417.33) JX1-89(2087.11,1385.83) JX1-90(1913.89,1385.83) JX1-91(2087.11,1354.33) JX1-92(1913.89,1354.33) JX1-93(2087.11,1322.83) JX1-94(1913.89,1322.84) JX1-95(2087.11,1291.34) JX1-96(1913.89,1291.34) JX1-97(2087.11,1259.84) JX1-98(1913.89,1259.85) JX1-99(2087.11,1228.35) JX1-100(1913.89,1228.35) JX2-1(337.11,2771.65) JX2-2(163.89,2771.65) JX2-3(337.11,2740.16) JX2-4(163.89,2740.16) JX2-5(337.11,2708.66) JX2-6(163.89,2708.66) JX2-7(337.11,2677.17) JX2-8(163.89,2677.17) JX2-9(337.11,2645.67) JX2-10(163.89,2645.67) JX2-11(337.11,2614.17) JX2-12(163.89,2614.17) JX2-13(337.11,2582.68) JX2-14(163.89,2582.68) JX2-15(337.11,2551.18) JX2-16(163.89,2551.18) JX2-17(337.11,2519.68) JX2-18(163.89,2519.69) JX2-19(337.11,2488.19) JX2-20(163.89,2488.19) JX2-21(337.11,2456.69) JX2-22(163.89,2456.69) JX2-23(337.11,2425.2) JX2-24(163.89,2425.2) JX2-25(337.11,2393.7) JX2-26(163.89,2393.7) JX2-27(337.11,2362.2) JX2-28(163.89,2362.21) JX2-29(337.11,2330.71) JX2-30(163.89,2330.71) JX2-31(337.11,2299.21) JX2-32(163.89,2299.21) JX2-33(337.11,2267.72) JX2-34(163.89,2267.72) JX2-35(337.11,2236.22) JX2-36(163.89,2236.22) JX2-37(337.11,2204.72) JX2-38(163.89,2204.73) JX2-39(337.11,2173.23) JX2-40(163.89,2173.23) JX2-41(337.11,2141.73) JX2-42(163.89,2141.73) JX2-43(337.11,2110.24) JX2-44(163.89,2110.24) JX2-45(337.11,2078.74) JX2-46(163.89,2078.74) JX2-47(337.11,2047.24) JX2-48(163.89,2047.25) JX2-49(337.11,2015.75) JX2-50(163.89,2015.75) JX2-51(337.11,1984.25) JX2-52(163.89,1984.25) JX2-53(337.11,1952.76) JX2-54(163.89,1952.76) JX2-55(337.11,1921.26) JX2-56(163.89,1921.26) JX2-57(337.11,1889.76) JX2-58(163.89,1889.77) JX2-59(337.11,1858.27) JX2-60(163.89,1858.27) JX2-61(337.11,1826.77) JX2-62(163.89,1826.77) JX2-63(337.11,1795.28) JX2-64(163.89,1795.28) JX2-65(337.11,1763.78) JX2-66(163.89,1763.78) JX2-67(337.11,1732.28) JX2-68(163.89,1732.29) JX2-69(337.11,1700.79) JX2-70(163.89,1700.79) JX2-71(337.11,1669.29) JX2-72(163.89,1669.29) JX2-73(337.11,1637.8) JX2-74(163.89,1637.8) JX2-75(337.11,1606.3) JX2-76(163.89,1606.3) JX2-77(337.11,1574.8) JX2-78(163.89,1574.81) JX2-79(337.11,1543.31) JX2-80(163.89,1543.31) JX2-81(337.11,1511.81) JX2-82(163.89,1511.81) JX2-83(337.11,1480.31) JX2-84(163.89,1480.32) JX2-85(337.11,1448.82) JX2-86(163.89,1448.82) JX2-87(337.11,1417.32) JX2-88(163.89,1417.33) JX2-89(337.11,1385.83) JX2-90(163.89,1385.83) JX2-91(337.11,1354.33) JX2-92(163.89,1354.33) JX2-93(337.11,1322.83) JX2-94(163.89,1322.84) JX2-95(337.11,1291.34) JX2-96(163.89,1291.34) JX2-97(337.11,1259.84) JX2-98(163.89,1259.85) JX2-99(337.11,1228.35) JX2-100(163.89,1228.35)
  Top Layer keep-out circle w4: c150,150 r150
  Top Layer keep-out circle w4: c2100,3850 r150
  Top Layer keep-out circle w4: c150,3850 r150
  Top Layer keep-out circle w4: c2100,150 r150
  Bottom Layer keep-out circle w4: c150,150 r150
  Bottom Layer keep-out circle w4: c2100,3850 r150
  Bottom Layer keep-out circle w4: c150,3850 r150
  Bottom Layer keep-out circle w4: c2100,150 r150
  silkscreen extent 0,0 2250,4000, body extent -1,0 2250,4000, height 186
NDS02V [mm]
  round 1.4 hole 0.97: 1(-1.27,0) 2(1.27,0) 3(1.27,7.62) 4(-1.27,7.62)
  silkscreen extent -3.84,-1.14 3.22,8.76, body extent -3.22,-1.14 3.22,8.76, height 7.15
PC104 [mm] "Connector; Header; 26x4 Position"
  round 6 hole 3.2: 0(-4.686,-11.809) 0(68.998,-11.823)
  rect 1.5x1.5 hole 0.9: 1(63.906,-4.064) 53(63.906,-9.139)
  round 1.5 hole 0.9: 2(63.906,-6.604) 3(61.366,-4.064) 4(61.366,-6.604) 5(58.826,-4.064) 6(58.826,-6.604) 7(56.286,-4.064) 8(56.286,-6.604) 9(53.746,-4.064) 10(53.746,-6.604) 11(51.206,-4.064) 12(51.206,-6.604) 13(48.666,-4.064) 14(48.666,-6.604) 15(46.126,-4.064) 16(46.126,-6.604) 17(43.561,-4.064) 18(43.586,-6.604) 19(41.046,-4.064) 20(41.046,-6.604) 21(38.506,-4.064) 22(38.506,-6.604) 23(35.966,-4.064) 24(35.966,-6.604) 25(33.426,-4.064) 26(33.426,-6.604) 27(30.886,-4.064) 28(30.886,-6.604) 29(28.346,-4.064) 30(28.346,-6.604) 31(25.806,-4.064) 32(25.806,-6.604) 33(23.266,-4.064) 34(23.266,-6.604) 35(20.726,-4.064) 36(20.726,-6.604) 37(18.186,-4.064) 38(18.186,-6.604) 39(15.646,-4.064) 40(15.646,-6.604) 41(13.106,-4.064) 42(13.106,-6.604) 43(10.566,-4.064) 44(10.566,-6.604) 45(8.026,-4.064) 46(8.026,-6.604) 47(5.486,-4.064) 48(5.486,-6.604) 49(2.946,-4.064) 50(2.946,-6.604) 51(0.406,-4.064) 52(0.406,-6.604) 54(63.906,-11.684) 55(61.366,-9.144) 56(61.366,-11.684) 57(58.826,-9.144) 58(58.826,-11.684) 59(56.286,-9.144) 60(56.286,-11.684) 61(53.746,-9.139) 62(53.746,-11.684) 63(51.206,-9.139) 64(51.206,-11.684) 65(48.666,-9.144) 66(48.666,-11.684) 67(46.126,-9.144) 68(46.126,-11.684) 69(43.561,-9.144) 70(43.586,-11.684) 71(41.046,-9.144) 72(41.046,-11.684) 73(38.506,-9.144) 74(38.506,-11.684) 75(35.966,-9.144) 76(35.966,-11.684) 77(33.426,-9.144) 78(33.426,-11.684) 79(30.886,-9.144) 80(30.886,-11.684) 81(28.346,-9.144) 82(28.346,-11.684) 83(25.806,-9.144) 84(25.806,-11.684) 85(23.266,-9.144) 86(23.266,-11.684) 87(20.726,-9.144) 88(20.726,-11.684) 89(18.186,-9.144) 90(18.186,-11.684) 91(15.646,-9.144) 92(15.646,-11.684) 93(13.106,-9.144) 94(13.106,-11.684) 95(10.566,-9.144) 96(10.566,-11.684) 97(8.026,-9.144) 98(8.026,-11.684) 99(5.486,-9.144) 100(5.486,-11.684) 101(2.946,-9.144) 102(2.946,-11.684) 103(0.406,-9.144) 104(0.406,-11.684)
  silkscreen extent -8.03,-12.95 65.28,-2.79, body extent -1.27,-12.83 65.28,-2.92, height 8.52
PC104_INVERTED [mm] "Connector; Header; 26x4 Position"
  round 6 hole 3.2: 0(-5.244,-0.012) 0(68.44,0.002)
  rect 1.5x1.5 hole 0.9: 1(-0.152,7.747) 53(-0.152,2.672)
  round 1.5 hole 0.9: 2(-0.152,5.207) 3(2.388,7.747) 4(2.388,5.207) 5(4.928,7.747) 6(4.928,5.207) 7(7.468,7.747) 8(7.468,5.207) 9(10.008,7.747) 10(10.008,5.207) 11(12.548,7.747) 12(12.548,5.207) 13(15.088,7.747) 14(15.088,5.207) 15(17.628,7.747) 16(17.628,5.207) 17(20.193,7.747) 18(20.168,5.207) 19(22.708,7.747) 20(22.708,5.207) 21(25.248,7.747) 22(25.248,5.207) 23(27.788,7.747) 24(27.788,5.207) 25(30.328,7.747) 26(30.328,5.207) 27(32.868,7.747) 28(32.868,5.207) 29(35.408,7.747) 30(35.408,5.207) 31(37.948,7.747) 32(37.948,5.207) 33(40.488,7.747) 34(40.488,5.207) 35(43.028,7.747) 36(43.028,5.207) 37(45.568,7.747) 38(45.568,5.207) 39(48.108,7.747) 40(48.108,5.207) 41(50.648,7.747) 42(50.648,5.207) 43(53.188,7.747) 44(53.188,5.207) 45(55.728,7.747) 46(55.728,5.207) 47(58.268,7.747) 48(58.268,5.207) 49(60.808,7.747) 50(60.808,5.207) 51(63.348,7.747) 52(63.348,5.207) 54(-0.152,0.127) 55(2.388,2.667) 56(2.388,0.127) 57(4.928,2.667) 58(4.928,0.127) 59(7.468,2.667) 60(7.468,0.127) 61(10.008,2.672) 62(10.008,0.127) 63(12.548,2.672) 64(12.548,0.127) 65(15.088,2.667) 66(15.088,0.127) 67(17.628,2.667) 68(17.628,0.127) 69(20.193,2.667) 70(20.168,0.127) 71(22.708,2.667) 72(22.708,0.127) 73(25.248,2.667) 74(25.248,0.127) 75(27.788,2.667) 76(27.788,0.127) 77(30.328,2.667) 78(30.328,0.127) 79(32.868,2.667) 80(32.868,0.127) 81(35.408,2.667) 82(35.408,0.127) 83(37.948,2.667) 84(37.948,0.127) 85(40.488,2.667) 86(40.488,0.127) 87(43.028,2.667) 88(43.028,0.127) 89(45.568,2.667) 90(45.568,0.127) 91(48.108,2.667) 92(48.108,0.127) 93(50.648,2.667) 94(50.648,0.127) 95(53.188,2.667) 96(53.188,0.127) 97(55.728,2.667) 98(55.728,0.127) 99(58.268,2.667) 100(58.268,0.127) 101(60.808,2.667) 102(60.808,0.127) 103(63.348,2.667) 104(63.348,0.127)
  silkscreen extent -8.29,-1.14 65.02,9.02, body extent -1.27,-1.14 64.77,9.02, height 8.39
PCC-SMP-V-K [mm] "Soquete de termopar especial PCCS para placa de circuito em série"
  rect 3.175x3.175 hole 1.905: 1(0,0)
  round 3.175 hole 1.905: 2(6.3,0)
  round 3.175 hole 2: 3(19,-5.1) 3(19,1.7)
  body extent -2.52,-5.65 22.48,2.35, height 15.5
"PICO BLADE 0532610471" [mm]
  rect 2.1x3 smd: 0(-4.425,-1.45) 0(4.425,-1.45)
  rect 0.8x1.6 smd: 1(-1.875,1.45) 2(-0.625,1.45) 3(0.625,1.45) 4(1.875,1.45)
  silkscreen extent -5.08,-3.7 5.07,0.7, body extent -5.07,-3.6 5.08,1.6, height 3.5
"PICO BLADE 0532610671" [mm]
  rect 2.1x3 smd: 0(-5.675,-1.45) 0(5.675,-1.45)
  rect 0.8x1.6 smd: 1(-3.125,1.45) 2(-1.875,1.45) 3(-0.625,1.45) 4(0.625,1.45) 5(1.875,1.45) 6(3.125,1.45)
  silkscreen extent -6.33,-3.7 6.32,0.7, body extent -6.32,-3.6 6.33,1.6, height 3.5
"PIN BAR 1 2.54mm 180 GRAUS - Hide" [mm] "HEADER 1 2.54mm 180 GRAUS"
  rect 1.6x1.6 hole 0.9: 1(0,0)
  silkscreen extent -1.13,-1.2 1.13,1.2, body extent -1.27,-1.24 1.27,1.25, height 8.54
"PIN BAR 2 2.54mm 180 GRAUS" [mm] "HEADER 2 2.54mm 180 GRAUS"
  rect 1.6x1.6 hole 0.9: 1(-1.27,0)
  round 1.398 hole 0.89: 2(1.27,0)
  silkscreen extent -2.4,-1.2 2.4,1.2, body extent -2.54,-1.27 2.54,1.27, height 8.22
"PIN BAR 2 2.54MM 180 GRAUS" [mm] "HEADER 2 2.54mm 180 GRAUS"
  rect 1.6x1.6 hole 0.9: 1(-1.27,0)
  round 1.398 hole 0.89: 2(1.27,0)
  silkscreen extent -2.4,-1.2 2.4,1.2, body extent -2.54,-1.27 2.54,1.27, height 8.22
QFN65P500X500X100-21N-D [mm]
  rect 1x0.35 smd: 1(-2.35,1.3) 2(-2.35,0.65) 3(-2.35,0) 4(-2.35,-0.65) 5(-2.35,-1.3) 11(2.35,-1.3) 12(2.35,-0.65) 13(2.35,0) 14(2.35,0.65) 15(2.35,1.3)
  rect 0.35x1 smd: 6(-1.3,-2.35) 7(-0.65,-2.35) 8(0,-2.35) 9(0.65,-2.35) 10(1.3,-2.35) 16(1.3,2.35) 17(0.65,2.35) 18(0,2.35) 19(-0.65,2.35) 20(-1.3,2.35)
  rect 3.25x3.25 smd: 21(0,0)
  silkscreen extent -3.01,2.11 -2.69,2.44, body extent -2.5,-2.5 2.5,2.5, height 1
QFP50P900X900X160-48N [mm]
  rect 1.6x0.3 smd: 1(-4.25,2.75) 2(-4.25,2.25) 3(-4.25,1.75) 4(-4.25,1.25) 5(-4.25,0.75) 6(-4.25,0.25) 7(-4.25,-0.25) 8(-4.25,-0.75) 9(-4.25,-1.25) 10(-4.25,-1.75) 11(-4.25,-2.25) 12(-4.25,-2.75) 25(4.25,-2.75) 26(4.25,-2.25) 27(4.25,-1.75) 28(4.25,-1.25) 29(4.25,-0.75) 30(4.25,-0.25) 31(4.25,0.25) 32(4.25,0.75) 33(4.25,1.25) 34(4.25,1.75) 35(4.25,2.25) 36(4.25,2.75)
  rect 0.3x1.6 smd: 13(-2.75,-4.25) 14(-2.25,-4.25) 15(-1.75,-4.25) 16(-1.25,-4.25) 17(-0.75,-4.25) 18(-0.25,-4.25) 19(0.25,-4.25) 20(0.75,-4.25) 21(1.25,-4.25) 22(1.75,-4.25) 23(2.25,-4.25) 24(2.75,-4.25) 37(2.75,4.25) 38(2.25,4.25) 39(1.75,4.25) 40(1.25,4.25) 41(0.75,4.25) 42(0.25,4.25) 43(-0.25,4.25) 44(-0.75,4.25) 45(-1.25,4.25) 46(-1.75,4.25) 47(-2.25,4.25) 48(-2.75,4.25)
  silkscreen extent -4.53,-3.1 3.1,3.73, body extent -4.5,-4.5 4.5,4.5, height 1.6
R0603_HD [mm] "Chip Resistor, Body 1.6x0.8mm, IPC High Density"
  rect 0.7x0.9 smd: 1(-0.762,0) 2(0.762,0)
  silkscreen extent -1.3,-0.6 1.3,0.6, body extent -0.8,-0.4 0.8,0.4, height 0.37
R0603_MD [mm] "Chip Resistor, Body 1.6x0.8mm, IPC Medium Density"
  rect 0.9x1 smd: 1(-0.889,0) 2(0.889,0)
  silkscreen extent -1.5,-0.7 1.5,0.7, body extent -0.8,-0.4 0.8,0.4, height 0.37
RL622 [mm]
  round 1.32 hole 0.82: 1(-2.51,-0.02) 2(2.49,-0.01)
  silkscreen extent -4.05,-4.09 4.05,4.01, body extent -4.25,-4.25 4.25,4.25, height 11.01
SAMTEC_TSW-107-05-F-D [mm]
  rect 1.37x1.37 hole 1.02: 1(0,0)
  round 1.37 hole 1.02: 2(0,2.54) 3(2.54,0) 4(2.54,2.54) 5(5.08,0) 6(5.08,2.54) 7(7.62,0) 8(7.62,2.54) 9(10.16,0) 10(10.16,2.54) 11(12.7,0) 12(12.7,2.54) 13(15.24,0) 14(15.24,2.54)
  silkscreen extent -1.27,-1.27 16.51,3.81, body extent -1.27,-1.27 16.51,3.81, height 5.22
SOIC127P599X175-8N [mm]
  rrect25% 1.97x0.6 smd: 1(-2.47,1.905) 2(-2.47,0.635) 3(-2.47,-0.635) 4(-2.47,-1.905) 5(2.47,-1.905) 6(2.47,-0.635) 7(2.47,0.635) 8(2.47,1.905)
  silkscreen extent -4.14,-2.52 1.95,2.52, body extent -3,-2.45 3,2.45, height 1.75
SOIC127P600X175-8N [mm]
  rrect25% 1.97x0.6 smd: 1(-2.475,1.905) 2(-2.475,0.635) 3(-2.475,-0.635) 4(-2.475,-1.905) 5(2.475,-1.905) 6(2.475,-0.635) 7(2.475,0.635) 8(2.475,1.905)
  silkscreen extent -4.34,-2.5 2,2.54, body extent -3,-2.45 3,2.45, height 1.75
"Solder Jumper" [mm]
  round 0.5 smd paste-0.25: 1(-0.4,0) 2(0.4,0)
  Top Layer region: -0.1,-0.594 -0.36,-0.535 -0.569,-0.368 -0.685,-0.128 -0.685,0.139 -0.569,0.38 -0.36,0.546 -0.1,0.606 -0.1,0.606
  Top Layer region: 0.1,0.594 0.36,0.535 0.569,0.368 0.685,0.128 0.685,-0.139 0.569,-0.38 0.36,-0.546 0.1,-0.606 0.1,-0.606
SOT50P160X60-6N [mm]
  rect 0.66x0.31 smd: 1(-0.735,0.5) 2(-0.735,0) 3(-0.735,-0.5) 4(0.735,-0.5) 5(0.735,0) 6(0.735,0.5)
  silkscreen extent -1.7,-0.97 0.6,0.97, body extent -0.8,-0.8 0.8,0.8, height 0.61
SOT95P240X120-3N [mm]
  rect 1x0.7 smd: 1(-1.2,0.95) 2(-1.2,-0.95) 3(1.2,0)
  silkscreen extent -1.7,-1.46 0.35,1.55, body extent -1.2,-1.46 1.2,1.46, height 1.2
SOT95P280X145-5N [mm]
  rrect50% 1.21x0.59 smd: 1(-1.255,0.95) 2(-1.255,0) 3(-1.255,-0.95) 4(1.255,-0.95) 5(1.255,0.95)
  silkscreen extent -2.51,-1.45 0.8,1.45, body extent -1.4,-1.45 1.4,1.45, height 1.45
SW-T3-2B-A-A3-S1 [mm] "SW-T3-2B-A-A3-S1"
  rect 2.843x1.093 hole 0.625 square: 1(2.599,1.599) 2(2.599,4.035) 3(2.599,6.535)
  body extent -2.92,-1.35 8,11, height 22.59
"TEST POINT PTH" [mm]
  round 1.5 hole 1: 1(0,0)
  silkscreen extent -1.1,-1.1 1.1,1.1
TPS3899DL30DSER [mm]
  rect 0.8x0.25 smd: 1(-0.55,0.5)
  rect 0.7x0.25 smd: 2(-0.6,0) 3(-0.6,-0.5) 4(0.6,-0.5) 5(0.6,0) 6(0.6,0.5)
  silkscreen extent -1.5,0.45 -1.4,0.55, body extent -0.75,-0.75 0.75,0.75, height 0.9
WE-PF_7427929...60 [mm]
  rect 2.9x5.4 smd: 1(-4.95,0) 2(4.95,0)
  silkscreen extent -6,-6 6,6, body extent -5.1,-5.1 5.1,5.1, height 6.49

## Part data
C1: "CAP CER 10000PF 16V 10% X7R 0603", Dielectric=X7R, Manufacturer=Murata, Supplier Part Number 1=81-GRM18R71C103KA01D, Voltage=16V, Category=Ceramic, Mount Type=SMD, Supplier 1=Mouser, Supplier 2=Digi-Key, Supplier Part Number 2=490-1525-1-ND
C2 C7 C11: "CAP CER 0.1UF 25V X7R 0603", Dielectric=X7R, Manufacturer="Samsung Electro-Mechanics America, Inc.", Supplier Part Number 1=1276-1006-1-ND, Voltage=25V, Category=Ceramic, Mount Type=SMD, Supplier 1=Digikey, Supplier 2=Arrow, Supplier Part Number 2=CL10B104KA8NNNC**MULT1
C3: "CAP CER 0.1UF 50V X7R 0603", Dielectric=X7R, Manufacturer="Murata Electronics North America", Supplier Part Number 1=490-13406-1-ND, Voltage=50V, Category=Ceramic, Mount Type=SMD, Supplier 1=Digi-Key
C4: "CAP CER 2.2UF 16V X7R 0603", Dielectric=X7R, Manufacturer="Taiyo Yuden", Supplier Part Number 1=587-4864-1-ND, Voltage=16V, Category=Ceramic, Mount Type=SMD, Supplier 1=Digi-Key, Supplier 2=Avnet, Supplier 3=Newark, Supplier Part Number 2=EMK107BB7225MA-T, Supplier Part Number 3=16AC1148
C5 C27: library part GRM188C81C106MA73D, "CAP CER 10UF 16V 20% X6S 0603", Manufacturer="Murata Electronics North America", Supplier Part Number 1=490-7198-1-ND, Voltage=16V, Category=Ceramic, Mount Type=SMD, Supplier 1=Digi-Key
C6: "CAP CER 1UF 16V Y5V 0603", Dielectric=Y5V, Manufacturer="Taiyo Yuden", Supplier Part Number 1=963-EMK107F105ZA-T, Voltage=16V, Category=Ceramic, Mount Type=SMD, Supplier 1=Mouser, Supplier 2=Digi-Key, Supplier 3=Farnell, Supplier 4=Newark, Supplier Part Number 2=587-1262-1-ND, Supplier Part Number 3=1213833, Supplier Part Number 4=18J2658
C8 C9 C13 C54: library part UMK107BJ105KA-T, "CAP CER 1UF 50V 10% X5R 0603", Manufacturer="Taiyo Yuden", Supplier Part Number 1=587-2400-1-ND, Voltage=50V, Mount Type=SMD, Supplier 1=Digi-Key
C12 C55: "10000pF 50V Ceramic Capacitor X7R 0603", Dielectric=X7R, Manufacturer="Samsung Electro-Mechanics America, Inc.", Supplier Part Number 1=1276-1009-1-ND, Voltage=50V, Category=Ceramic, Mount Type=SMD, Supplier 1=Digi-Key, Supplier 2=Newark, Supplier 3=Farnell, Supplier Part Number 2=30C5334, Supplier Part Number 3=2253099
C14 C15: library part Cap_Cer_X7R_1.0uF_50V_0805, "CAP CER 1.0uF 50V 10% X7R 0805", Manufacturer Part Number=C0805X105K5RACAUTO, NCM=8532.24.10
C16 C17 C18: library part Cap_Cer_X7R_10uF_16V_1210, "CAP CER 10uF 16V 10% X7R 1210", Manufacturer Part Number=C1210C106K4RACTU, NCM=8532.24.10
C19 C21 C22 C23 C24 C25 C26 C28: library part Cap_Cer_X7R_0.1uF_25V_0805, "CAP CER 0.1uF 25V 10% X7R 0805", Manufacturer Part Number=CC0805KRX7R8BB104, NCM=8532.24.10
C20: "Capacitor Polarised", Manufacturer_Name="Wurth Elektronik", Mouser Part Number=710-865080845004, Datasheet Link=https://www.we-online.com/components/products/datasheet/865080845004.pdf, Height=7.7mm, Manufacturer_Part_Number=865080845004, Mouser Price/Stock=https://www.mouser.co.uk/ProductDetail/Wurth-Elektronik/865080845004?qs=amGC7iS6iy%2F670KNm88i8Q%3D%3D
C29 C30: library part Cap_Cer_X7R_100nF_50V_0603, "CAP CER 100nF 50V 10% X7R 0603", Manufacturer Part Number=C0603C104K5RAC3121, NCM=8532.24.10
C52: "CAP CER 0.047UF 50V X7R 0603", Dielectric=X7R, Manufacturer="Samsung Electro-Mechanics", Supplier Part Number 1=1276-1063-1-ND, Voltage=50V, Category=Ceramic, Mount Type=SMD, Supplier 1=Digi-Key
C53: "CAP CER 0.022UF 50V X7R 0603", Dielectric=X7R, Manufacturer="Samsung Electro-Mechanics America, Inc.", Supplier Part Number 1=CL10B223KB8NNNC**MULT1, Voltage=50V, Category=Ceramic, Mount Type=SMD, Supplier 1=Arrow, Supplier 2=Digi-Key, Supplier Part Number 2=1276-1104-1-ND
CH1: "PCB Solder jumper", Action=Latched, Circuit=SPST, Mount Type=SMD
CN1 CN8 CN9 CN10: "02 MODII HDR SRST B/A .100CL", Manufacturer="TE Connectivity", Supplier Part Number 1=38922002, Mount Type=PTH, N of Positions=2, Pitch=2.54mm, Supplier 1=Arrow, Supplier 2=Mouser, Supplier 3=Newark, Supplier 4=Digi-Key, Supplier 5=Farnell, Supplier Part Number 2=571-5-146285-2, Supplier Part Number 3=16M3972, Supplier Part Number 4=5-146285-2-ND, Supplier Part Number 5=1341684
CN2 CN13: "POMONA, 4243-0, Binding Post, 4243 Series, 15 A, 60 VDC, Tin Plated Contacts, Brass, Black", Color=Black,Red, Current Rating=15A, Housing Color=Black, Manufacturer="Pomona Electronics", Package Quantity=5, Supplier Part Number 1=501-1126-ND, Voltage Rating=2.5kV, Voltage Rating (AC)=30V, Voltage Rating (DC)=60V, Body Material=Brass, Category=Connectors, ComponentLink1Description=https://datasheet.ciiva.com/1453/d4243-1-01-1453890.pdf?src-supplier=Element14, ComponentLink1URL=https://datasheet.ciiva.com/1453/d4243-1-01-1453890.pdf?src-supplier=Element14, ComponentLink2Description=https://datasheet.ciiva.com/16883/70198115-16883751.pdf?src-supplier=Allied+Electronics, ComponentLink2URL=https://datasheet.ciiva.com/16883/70198115-16883751.pdf?src-supplier=Allied+Electronics, ComponentLink3Description=https://datasheet.ciiva.com/30105/d4243-1-02-30105753.pdf?src-supplier=Onlinecomponents.com, ComponentLink3URL=https://datasheet.ciiva.com/30105/d4243-1-02-30105753.pdf?src-supplier=Onlinecomponents.com, Contact Material=Brass, Contact Plating=Tin,Bright, Depth=11.18mm, Hole Diameter=0.1inch, Housing Material=Polycarbonate, Insulation=Insulated, Insulation Material=Polycarbonate, Lead Free="Lead Free", Length=30.23mm, Manufacturer Part Number=4243-0, Max Current Rating=15A, Mount=Panel, Number of Pins=1, Number of Ports=2, Orientation=Straight, Packaging=Bulk, Panel Thickness=6.35mm, Pricing 1="1=8.99000, 25=8.54040, 50=8.09100, 100=7.73150 (USD)", REACH SVHC="No SVHC", RoHS=Yes, Stock 1=327, Supplier 1=Digi-Key, Termination=Turret
CN3 CN6: library part 0533980471, "1.25mm Pitch PicoBlade™ Header, Surface Mount, Vertical, 4 Circuits", Color=Natural, Contact Resistance=20mR, Current Rating=1A, Flammability Rating="UL94 V-0", Insulation Resistance=100MR, Manufacturer=Molex, Manufacturer Part Number=53398-0471, Max Operating Temperature=85°C, Min Operating Temperature=-40°C, Package Quantity=1000, Supplier Part Number 1=WM7608CT-ND, Voltage Rating=125V, Body Plating=Tin, ComponentLink1Description=http://www.mouser.com/ds/2/276/0533980471_PCB_HEADERS-171069.pdf?src-supplier=Mouser, ComponentLink1URL=http://www.mouser.com/ds/2/276/0533980471_PCB_HEADERS-171069.pdf?src-supplier=Mouser, ComponentLink2Description=http://www.jameco.com/Jameco/Products/ProdDS/1932627.pdf?src-supplier=Jameco, ComponentLink2URL=http://www.jameco.com/Jameco/Products/ProdDS/1932627.pdf?src-supplier=Jameco, ComponentLink3Description=https://www.distrelec.biz/Web/Downloads/46/_e/gf116833-116846_e.pdf?mime=application%2Fpdf&src-supplier=Distrelec, ComponentLink3URL=https://www.distrelec.biz/Web/Downloads/46/_e/gf116833-116846_e.pdf?mime=application%2Fpdf&src-supplier=Distrelec, ComponentLink4Description=http://www.molex.com/webdocs/datasheets/pdf/en-us/0533980471_PCB_HEADERS.pdf?src-supplier=Element14, ComponentLink4URL=http://www.molex.com/webdocs/datasheets/pdf/en-us/0533980471_PCB_HEADERS.pdf?src-supplier=Element14, ComponentLink5Description=http://www.farnell.com/datasheets/1867381.pdf?src-supplier=Element14, ComponentLink5URL=http://www.farnell.com/datasheets/1867381.pdf?src-supplier=Element14, ComponentLink6Description=http://uk.rs-online.com/webdocs/13c4/0900766b813c4500.pdf?src-supplier=RSComponents, ComponentLink6URL=http://uk.rs-online.com/webdocs/13c4/0900766b813c4500.pdf?src-supplier=RSComponents, ComponentLink7Description=http://www.molex.com/webdocs/datasheets/pdf/en-us/0533980471_PCB_HEADERS.pdf?src-supplier=Farnell, ComponentLink7URL=http://www.molex.com/webdocs/datasheets/pdf/en-us/0533980471_PCB_HEADERS.pdf?src-supplier=Farnell, ComponentLink8Description=http://www.farnell.com/datasheets/2697809.pdf?src-supplier=Element14, ComponentLink8URL=http://www.farnell.com/datasheets/2697809.pdf?src-supplier=Element14, ComponentLink9Description=http://www.molex.com/webdocs/datasheets/pdf/en-us/0533980471_PCB_HEADERS.pdf?src-supplier=Avnet, ComponentLink9URL=http://www.molex.com/webdocs/datasheets/pdf/en-us/0533980471_PCB_HEADERS.pdf?src-supplier=Avnet, ComponentLink10Description=http://www.molex.com/webdocs/datasheets/pdf/en-us/0533980471_PCB_HEADERS.pdf?src-supplier=Avnet+Europe, ComponentLink10URL=http://www.molex.com/webdocs/datasheets/pdf/en-us/0533980471_PCB_HEADERS.pdf?src-supplier=Avnet+Europe, Contact Material=Bronze,Tin,Brass, Contact Plating=Tin, Gender=Male, Glow Wire Compliant=Non-compliant, Housing Color=Natural, Housing Material=Nylon, Lead Free="Lead Free", Lead Pitch=1.25mm, Mount="Surface Mount", Mount Type=SMD, N of Positions=4, Number of Circuits=4, Number of Contacts=4, Number of Positions=4, Number of Rows=1, Orientation=Vertical, Packaging="Tape and Reel", Pitch=1.25mm, Pricing 1="1=1.19, 10=1.044, 100=0.901, 500=0.73716 (USD)", Pricing 2="1=0.98, 10=0.832, 100=0.716, 500=0.6, 1000=0.391, 2000=0.342 (USD)", Radiation Hardening=No, REACH SVHC=Unknown, Stock 1=21236, Stock 2=43680, Supplier 1=Digi-Key, Supplier 2=Mouser, Supplier Part Number 2=538-53398-0471, Termination=Solder, Voltage Rating (AC)=125V, Voltage Rating (DC)=125V, Working Voltage=125V
CN4 CN5: library part 53398-0671, "1.25mm Pitch PicoBlade™ Header, Surface Mount, Vertical, 6 Circuits", Color=Natural, Contact Resistance=20mR, Current Rating=1A, Flammability Rating="UL94 V-0", Insulation Resistance=100MR, Manufacturer=Molex, Max Operating Temperature=85°C, Min Operating Temperature=-40°C, Package Quantity=1000, Supplier Part Number 1=WM7610DKR-ND, Voltage Rating=125V, Body Plating=Tin, ComponentLink1Description=https://www.molex.com/pdm_docs/sd/533980671_sd.pdf?src-supplier=Digi-Key, ComponentLink1URL=https://www.molex.com/pdm_docs/sd/533980671_sd.pdf?src-supplier=Digi-Key, Contact Material=Bronze,Tin, Contact Plating=Tin, Gender=Male, Glow Wire Compliant=Non-compliant, Housing Color=Natural, Housing Material=Nylon, Lead Free="Lead Free", Lead Pitch=1.25mm, Manufacturer Part Number=53398-0671, Mount="Surface Mount", Number of Circuits=6, Number of Contacts=6, Number of Positions=6, Number of Rows=1, Orientation=Vertical, Packaging="Tape and Reel", Pitch=1.25mm, Pricing 1="1=1.39, 10=1.26, 100=1.0802, 500=0.90014 (USD)", Pricing 2="1=1.15, 10=1.01, 100=0.864, 500=0.727, 1000=0.427, 2000=0.374 (USD)", Radiation Hardening=No, REACH SVHC=Unknown, Stock 1=21086, Stock 2=26, Supplier 1=Digi-Key, Supplier 2=Mouser, Supplier Part Number 2=538-53398-0671, Termination=Solder, Voltage Rating (AC)=125V, Voltage Rating (DC)=125V, Working Voltage=125V
CN14: "CONN HEADER 1POS .100\" SNGL TIN", Manufacturer="Samtec Inc", Supplier Part Number 1=1925384, Manufacturer Part Number=TSW-101-05-T-S, Mount Type=PTH, N of Positions=2, Pitch=2.54mm, Supplier 1=Farnell, Supplier 2=Newark, Supplier 3=Digi-Key, Supplier 4=Arrow, Supplier 5=Digi-Key, Supplier 6=Newark, Supplier Part Number 2=84T5043, Supplier Part Number 3=SAM1019-02-ND, Supplier Part Number 4=T9xGEsh_w6igb0LY4EP_nwsWhIkhCEmR3qLYTGm2XzA, Supplier Part Number 5=SAM1019-01-ND, Supplier Part Number 6=69X6269
CN15: library part 5-146285-2, "CONN HEADER TOP 2POS 2.5MM GRN", Manufacturer="TE Connectivity", Supplier Part Number 1=38922002, Mount Type=PTH, N of Positions=2, Pitch=2.54mm, Supplier 1=Arrow, Supplier 2=Mouser, Supplier 3=Newark, Supplier 4=Digi-Key, Supplier 5=Farnell, Supplier Part Number 2=571-5-146285-2, Supplier Part Number 3=16M3972, Supplier Part Number 4=5-146285-2-ND, Supplier Part Number 5=1341684
CN16 CN26: library part B2B-XH-A-M(LF)(SN), "CONN HEADER TOP 2POS 2.5MM GRN", Color=Natural, Manufacturer=JST, Package Quantity=1000, Supplier Part Number 1=455-2879-ND, ComponentLink1Description=http://www.jst-mfg.com/product/pdf/eng/eXH.pdf, ComponentLink1URL=http://www.jst-mfg.com/product/pdf/eng/eXH.pdf, Connector Type="Male Pin", Contact Plating=Tin, Fastening Type=Detent, Manufacturer Part Number=B2B-XH-A-M(LF)(SN), Mount="Through Hole", Number of Positions=2, Number of Rows=1, Packaging=Bulk, Pitch=0.098inch, Pricing 1="1=0.17, 10=0.157, 100=0.0966, 500=0.07998, 1000=0.06999, 5000=0.05999, 10000=0.05832 (USD)", Stock 1=5564, Supplier 1=Digi-Key, Termination=Press-Fit
CN20: Manufacturer Part Number=TSW-126-07-G-D
CN21 CN22 CN23 CN24 CN25: Manufacturer Part Number=SSW-126-01-G-D
D1: "Diode", Manufacturer_Name="Texas Instruments", Mouser Part Number=595-ESDS314DBVR, Arrow Part Number=ESDS314DBVR, Arrow Price/Stock=https://www.arrow.com/en/products/esds314dbvr/texas-instruments?utm_currency=USD&region=nac, Datasheet Link=http://www.ti.com/lit/gpn/esds314, Height=1.45mm, Manufacturer_Part_Number=ESDS314DBVR, Mouser Price/Stock=https://www.mouser.co.uk/ProductDetail/Texas-Instruments/ESDS314DBVR?qs=w%2Fv1CP2dgqpkGBpJKrSLAg%3D%3D
FD1 FD2 FD3 FD4 FD5 FD6 FD7 FD8: "Fiducial 1.3mm"
IC1 IC2: "Integrated Circuit", Manufacturer_Name="Texas Instruments", Mouser Part Number=595-TPS74401RGWRM3, Datasheet Link=https://www.ti.com/lit/ds/symlink/tps74401.pdf?ts=1748825387292, Height=1mm, Manufacturer_Part_Number=TPS74401RGWRM3, Mouser Price/Stock=https://www.mouser.co.uk/ProductDetail/Texas-Instruments/TPS74401RGWRM3?qs=jcD%2FCkGBYeMb5sDaJ6BKNg%3D%3D
IC4: "Integrated Circuit", Manufacturer_Name="Texas Instruments", Mouser Part Number=595-TPS3899DL30DSER, Datasheet Link=https://www.ti.com/lit/ds/symlink/tps3899.pdf?ts=1744754683287&ref_url=https%253A%252F%252Fwww.mouser.com%252F, Height=0.8mm, Manufacturer_Part_Number=TPS3899DL30DSER, Mouser Price/Stock=https://www.mouser.co.uk/ProductDetail/Texas-Instruments/TPS3899DL30DSER?qs=pBJMDPsKWf3Gvj4NR5zaDA%3D%3D
IC5: "Integrated Circuit", Manufacturer_Name="Texas Instruments", Mouser Part Number=595-LM321LVIDBVR, Arrow Part Number=LM321LVIDBVR, Arrow Price/Stock=https://www.arrow.com/en/products/lm321lvidbvr/texas-instruments?utm_currency=USD&region=europe, Datasheet Link=http://www.ti.com/lit/gpn/lm321lv, Height=1.45mm, Manufacturer_Part_Number=LM321LVIDBVR, Mouser Price/Stock=https://www.mouser.co.uk/ProductDetail/Texas-Instruments/LM321LVIDBVR?qs=qSfuJ%252Bfl%2Fd66sZ569ResAQ%3D%3D
IC6 IC7: "Integrated Circuit", Manufacturer_Name=Diotec, Mouser Part Number=637-MMBT3904, Arrow Part Number=MMBT3904, Arrow Price/Stock=https://www.arrow.com/en/products/mmbt3904/diotec-semiconductor-ag?utm_currency=USD&region=europe, Datasheet Link=https://media.digikey.com/pdf/Data%20Sheets/ON%20Semiconductor%20PDFs/2N3904,MMBT3904,PZT3904.pdf, Height=1.2mm, Manufacturer_Part_Number=MMBT3904, Mouser Price/Stock=https://www.mouser.co.uk/ProductDetail/Diotec-Semiconductor/MMBT3904?qs=OlC7AqGiEDkK1MwiyUU6mg%3D%3D
J1 J2: "02 MODII HDR SRST B/A .100CL", Package=None, Availability=Unavailable, Centerline_Pitch="2.54 mm[.1 in]", EU_RoHS_Compliance=Compliant, Manufacturer Part Number=5-146280-2, MF="TE Connectivity", Number_of_Positions=2, Price=None, Product_Type=Connector, SnapEDA_Link=https://www.snapeda.com/parts/5-146280-2/TE%20Connectivity%20AMP%20Connectors/view-part/298520/?ref=snap, TE_purchase_URL=https://www.te.com/usa-en/product-5-146280-2.html?te_bu=Cor&te_type=disp&te_campaign=seda_glo_cor-seda-global-disp-prtnr-fy19-seda-model-bom-cta_sma-317_1&elqCampaignId=32493